# Altium PCB FMC_DIO_32ch_lvds_a.PcbDoc (part 1 of 6)
Units mm, origin at the board's own origin, x right, y up, seen from the top; angles counter-clockwise.
Board outline 69.13 x 77.46 mm, 4 copper layers (Top Layer, G, SUP, Bottom Layer), stack 1.448 mm thick; 558 components, 348 nets, 1996 pads, 784 vias.
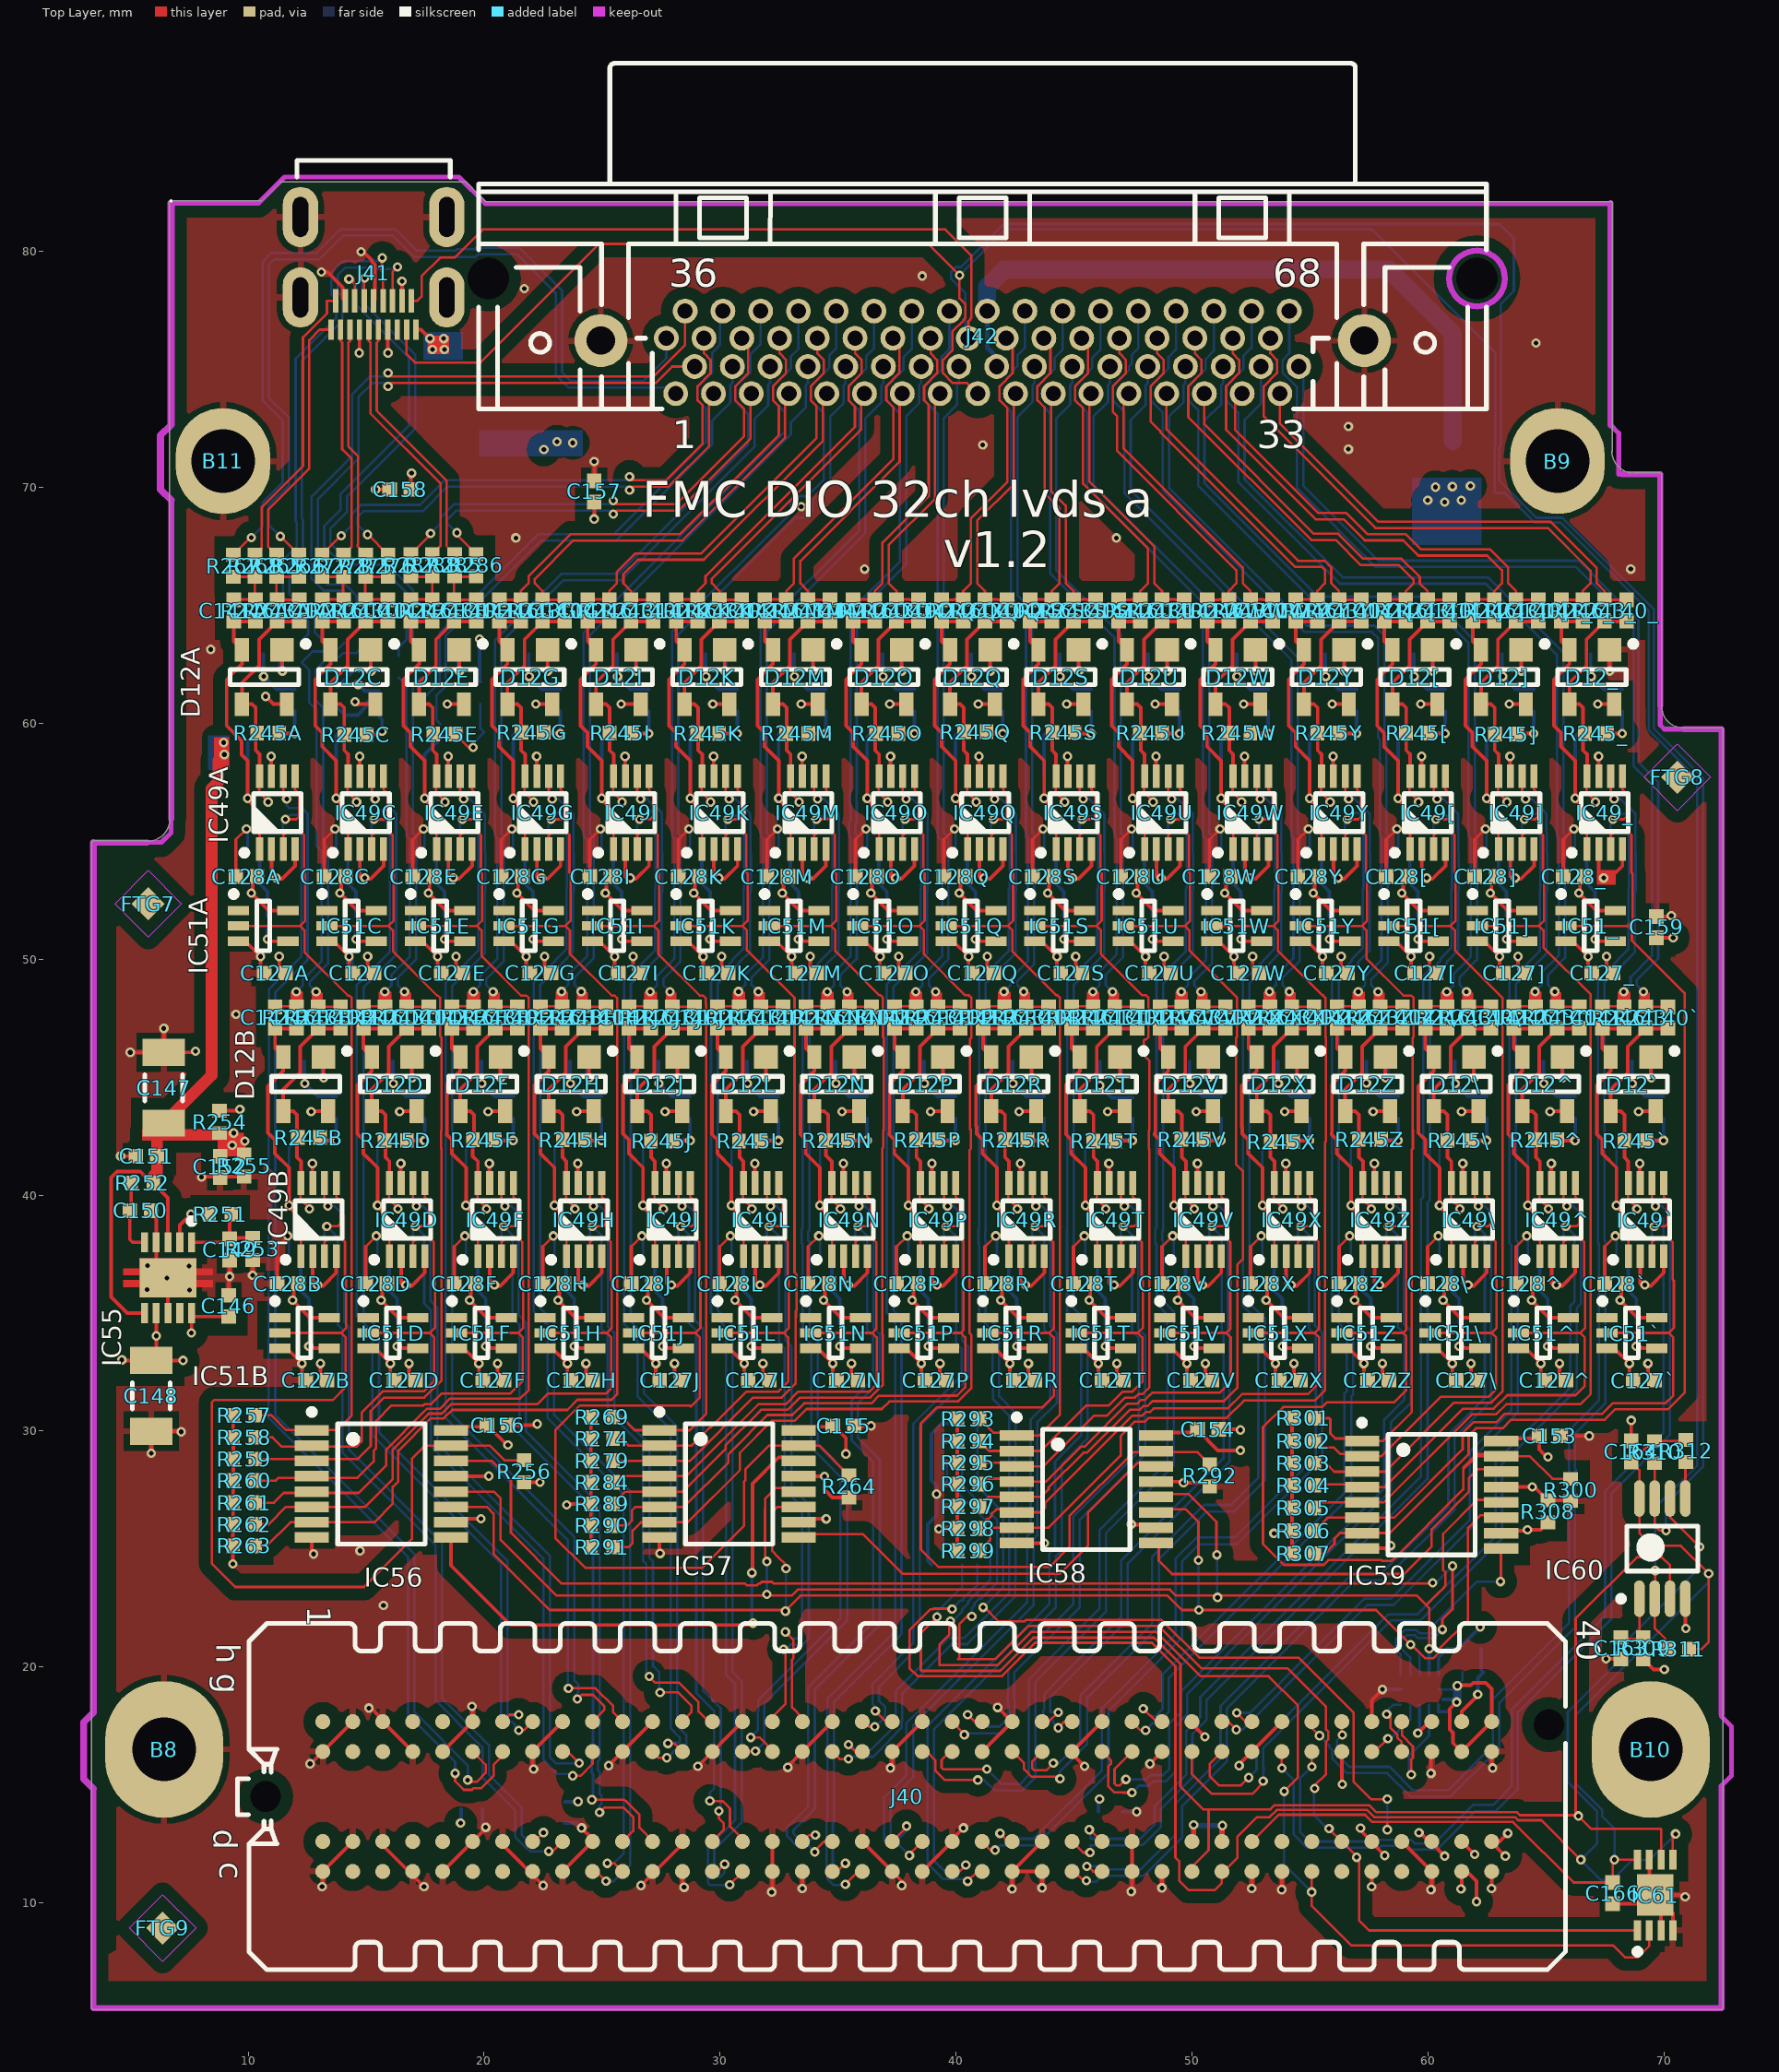
[diagram p0: Top Layer view]
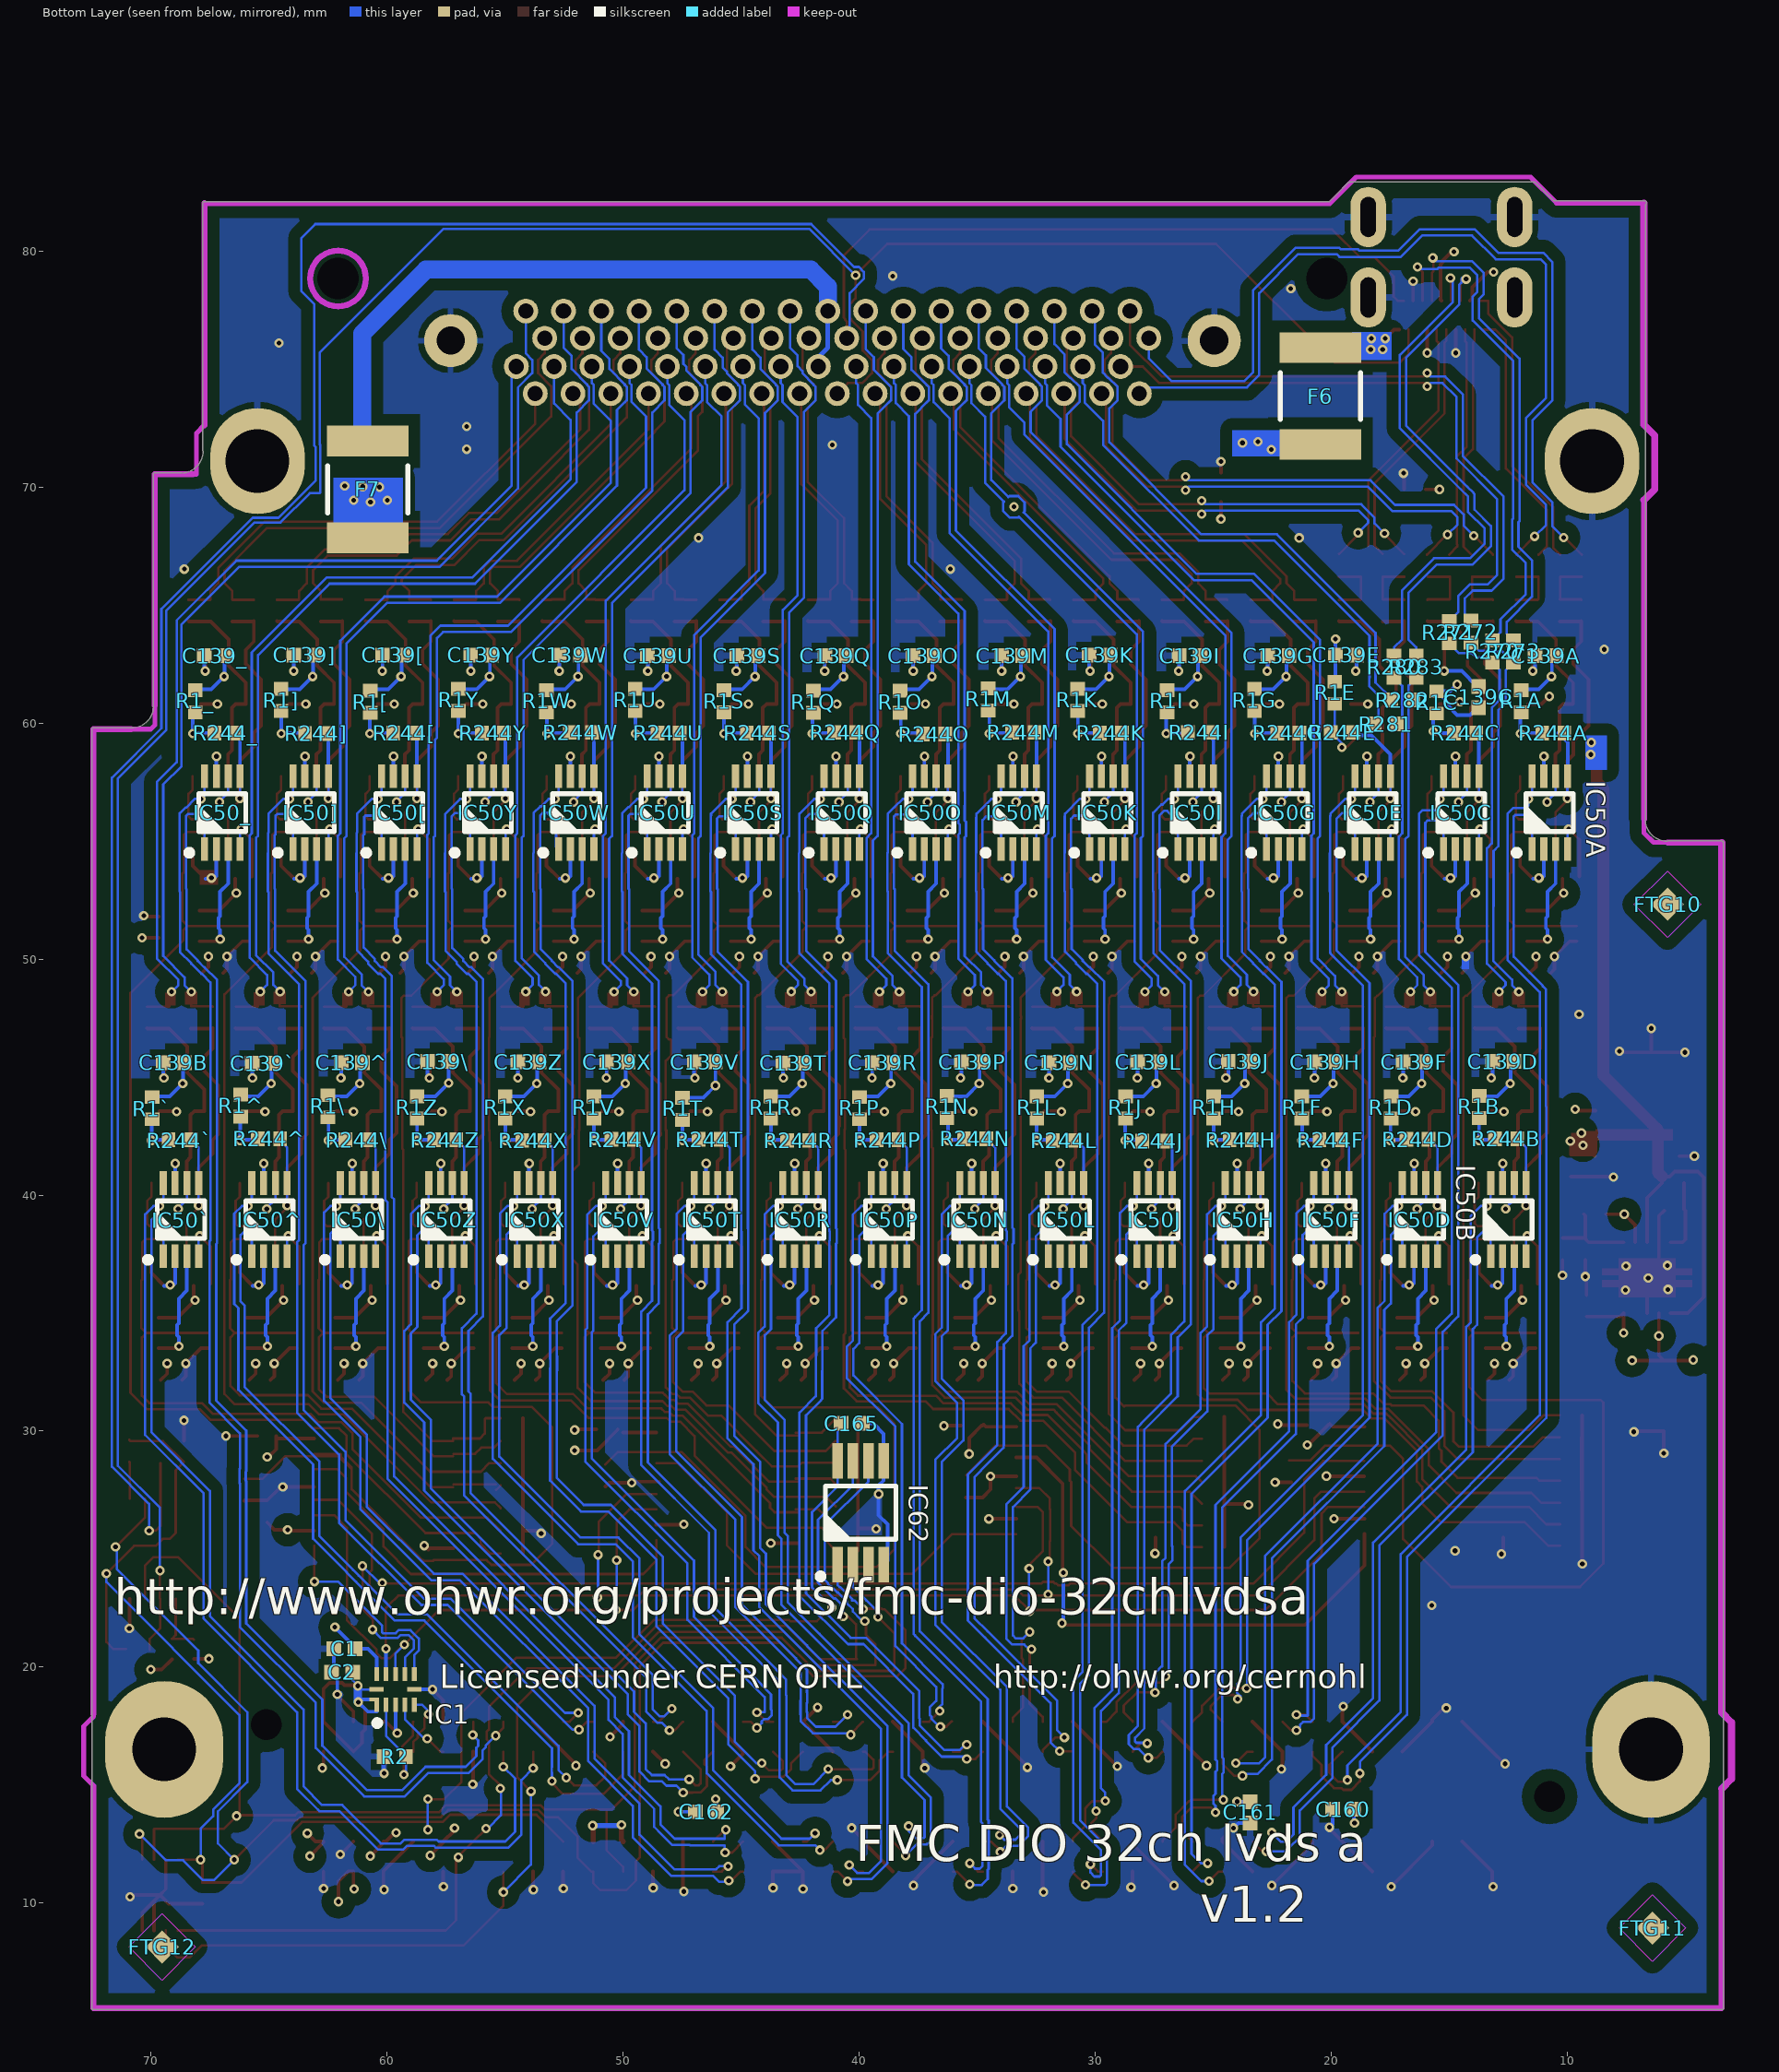
[diagram p1: Bottom Layer view, seen from below]
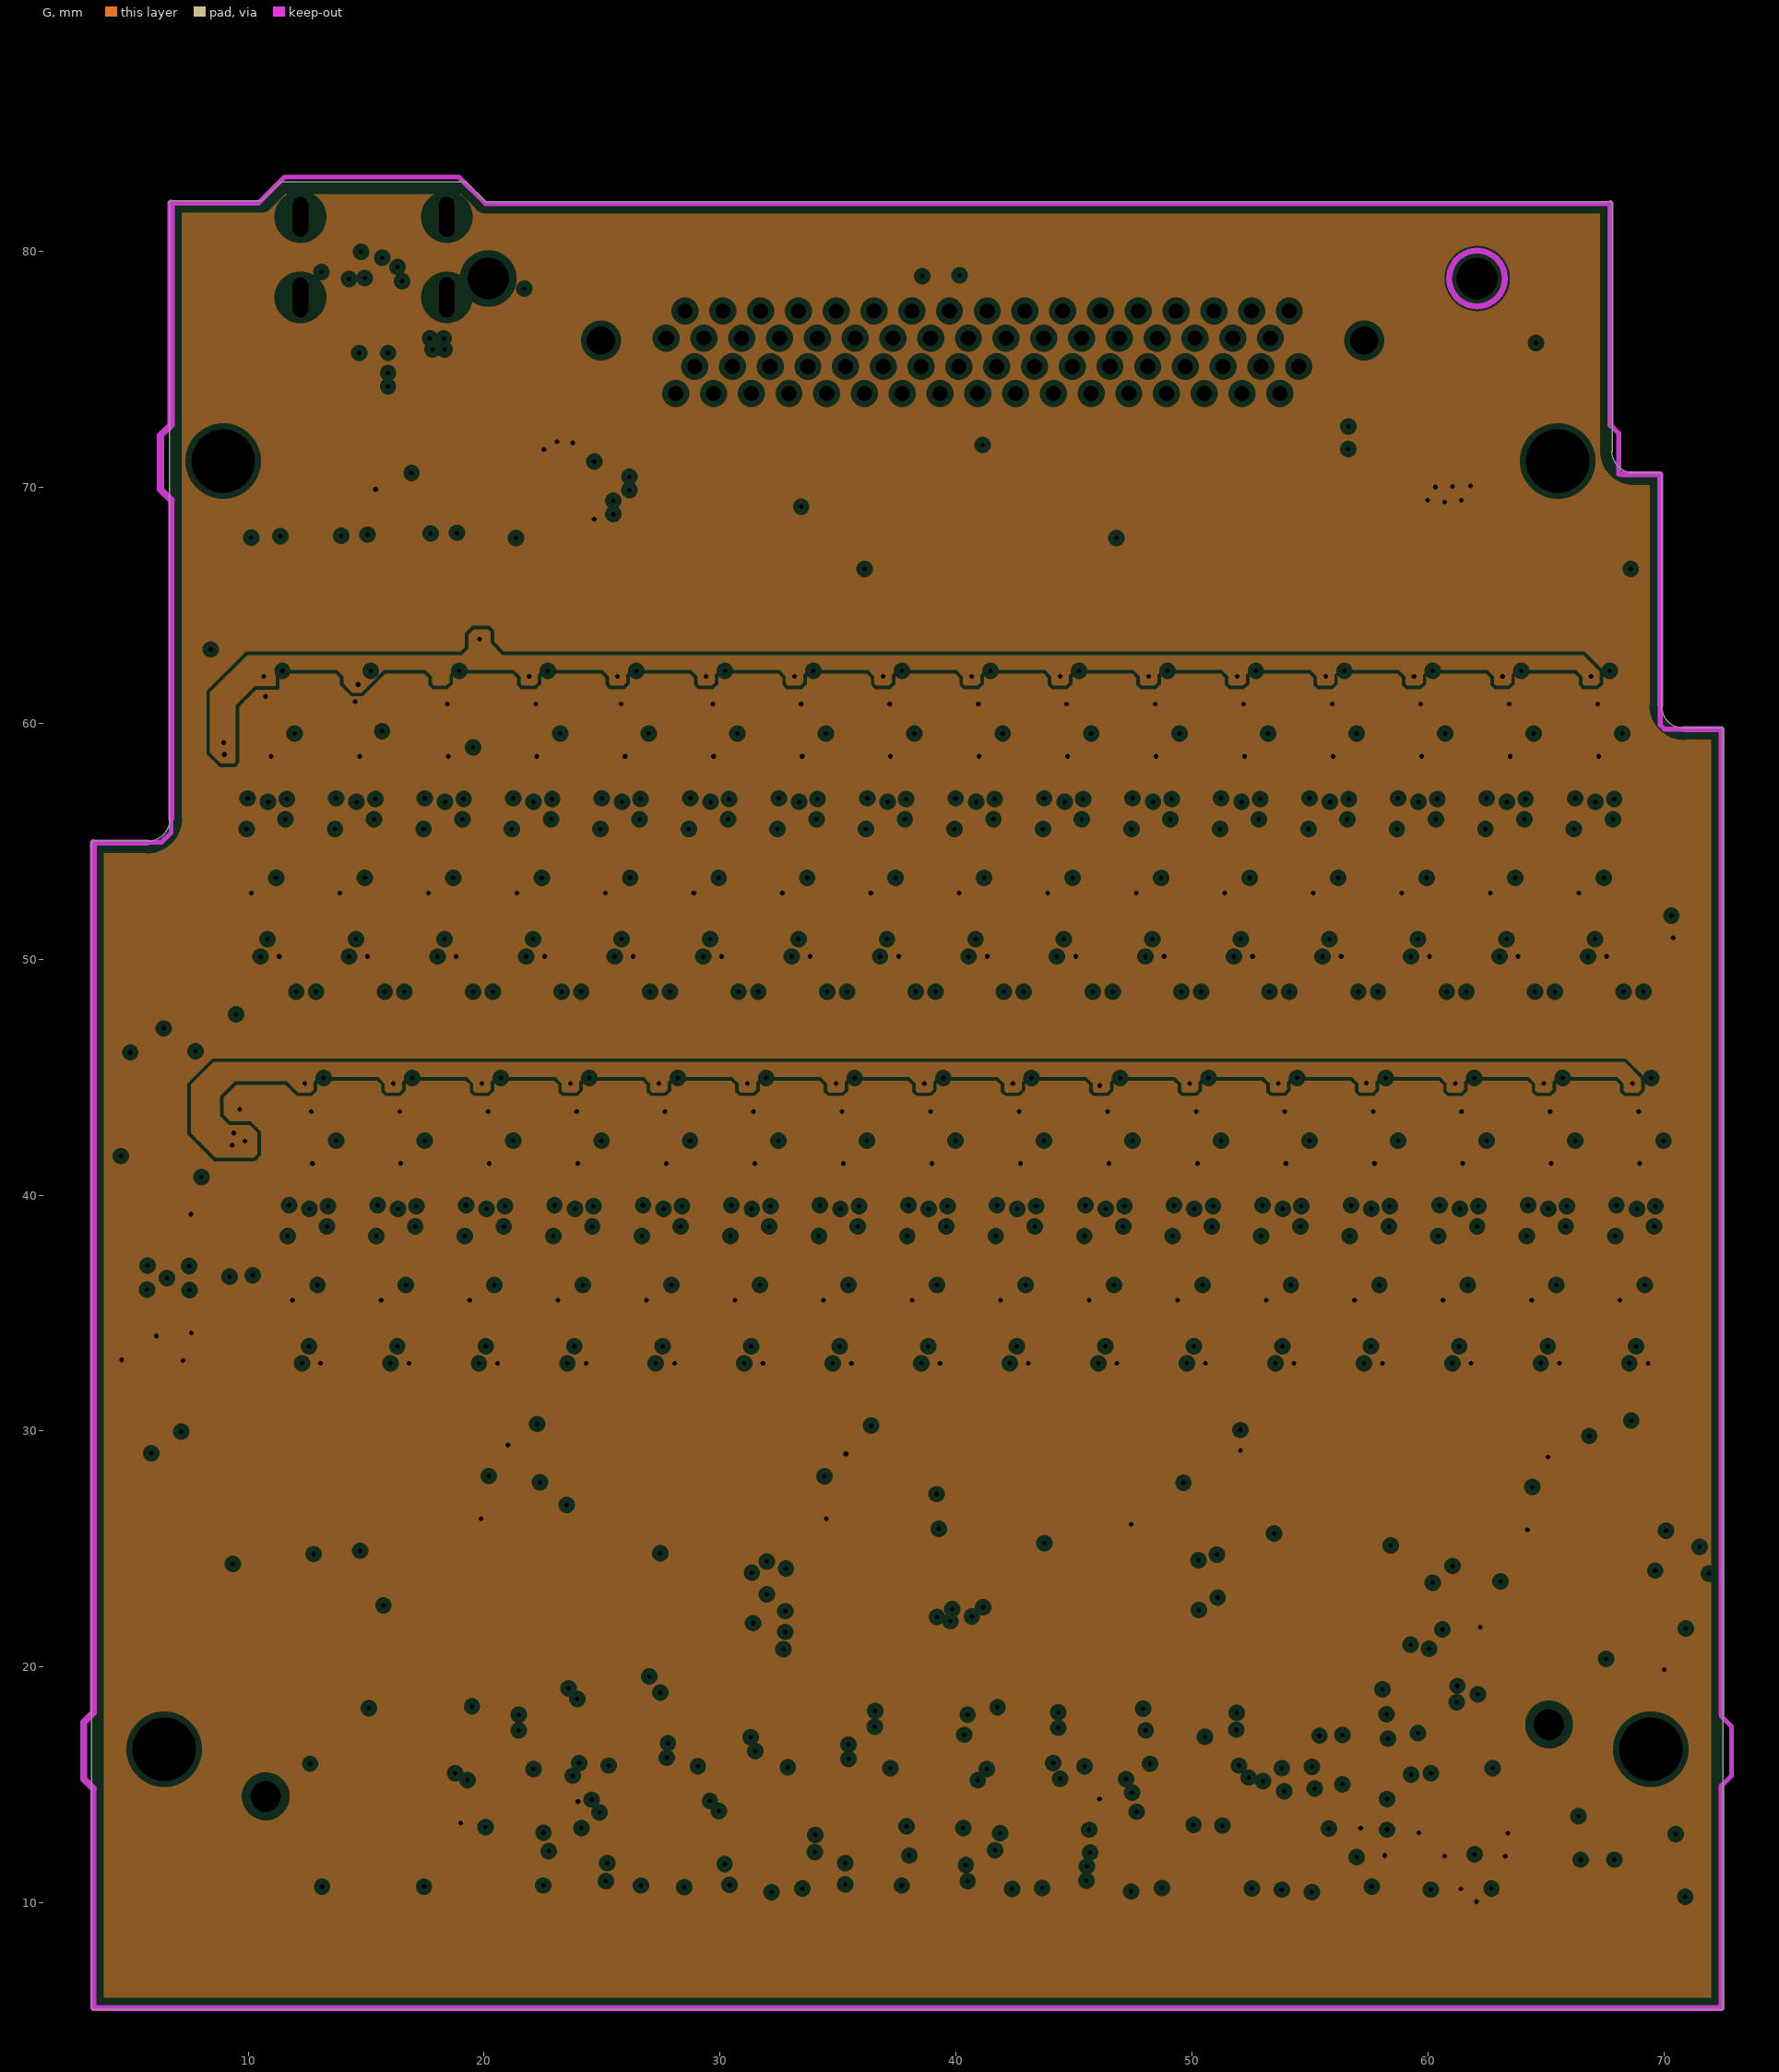
[diagram p2: G, clearances drawn from the general rule]
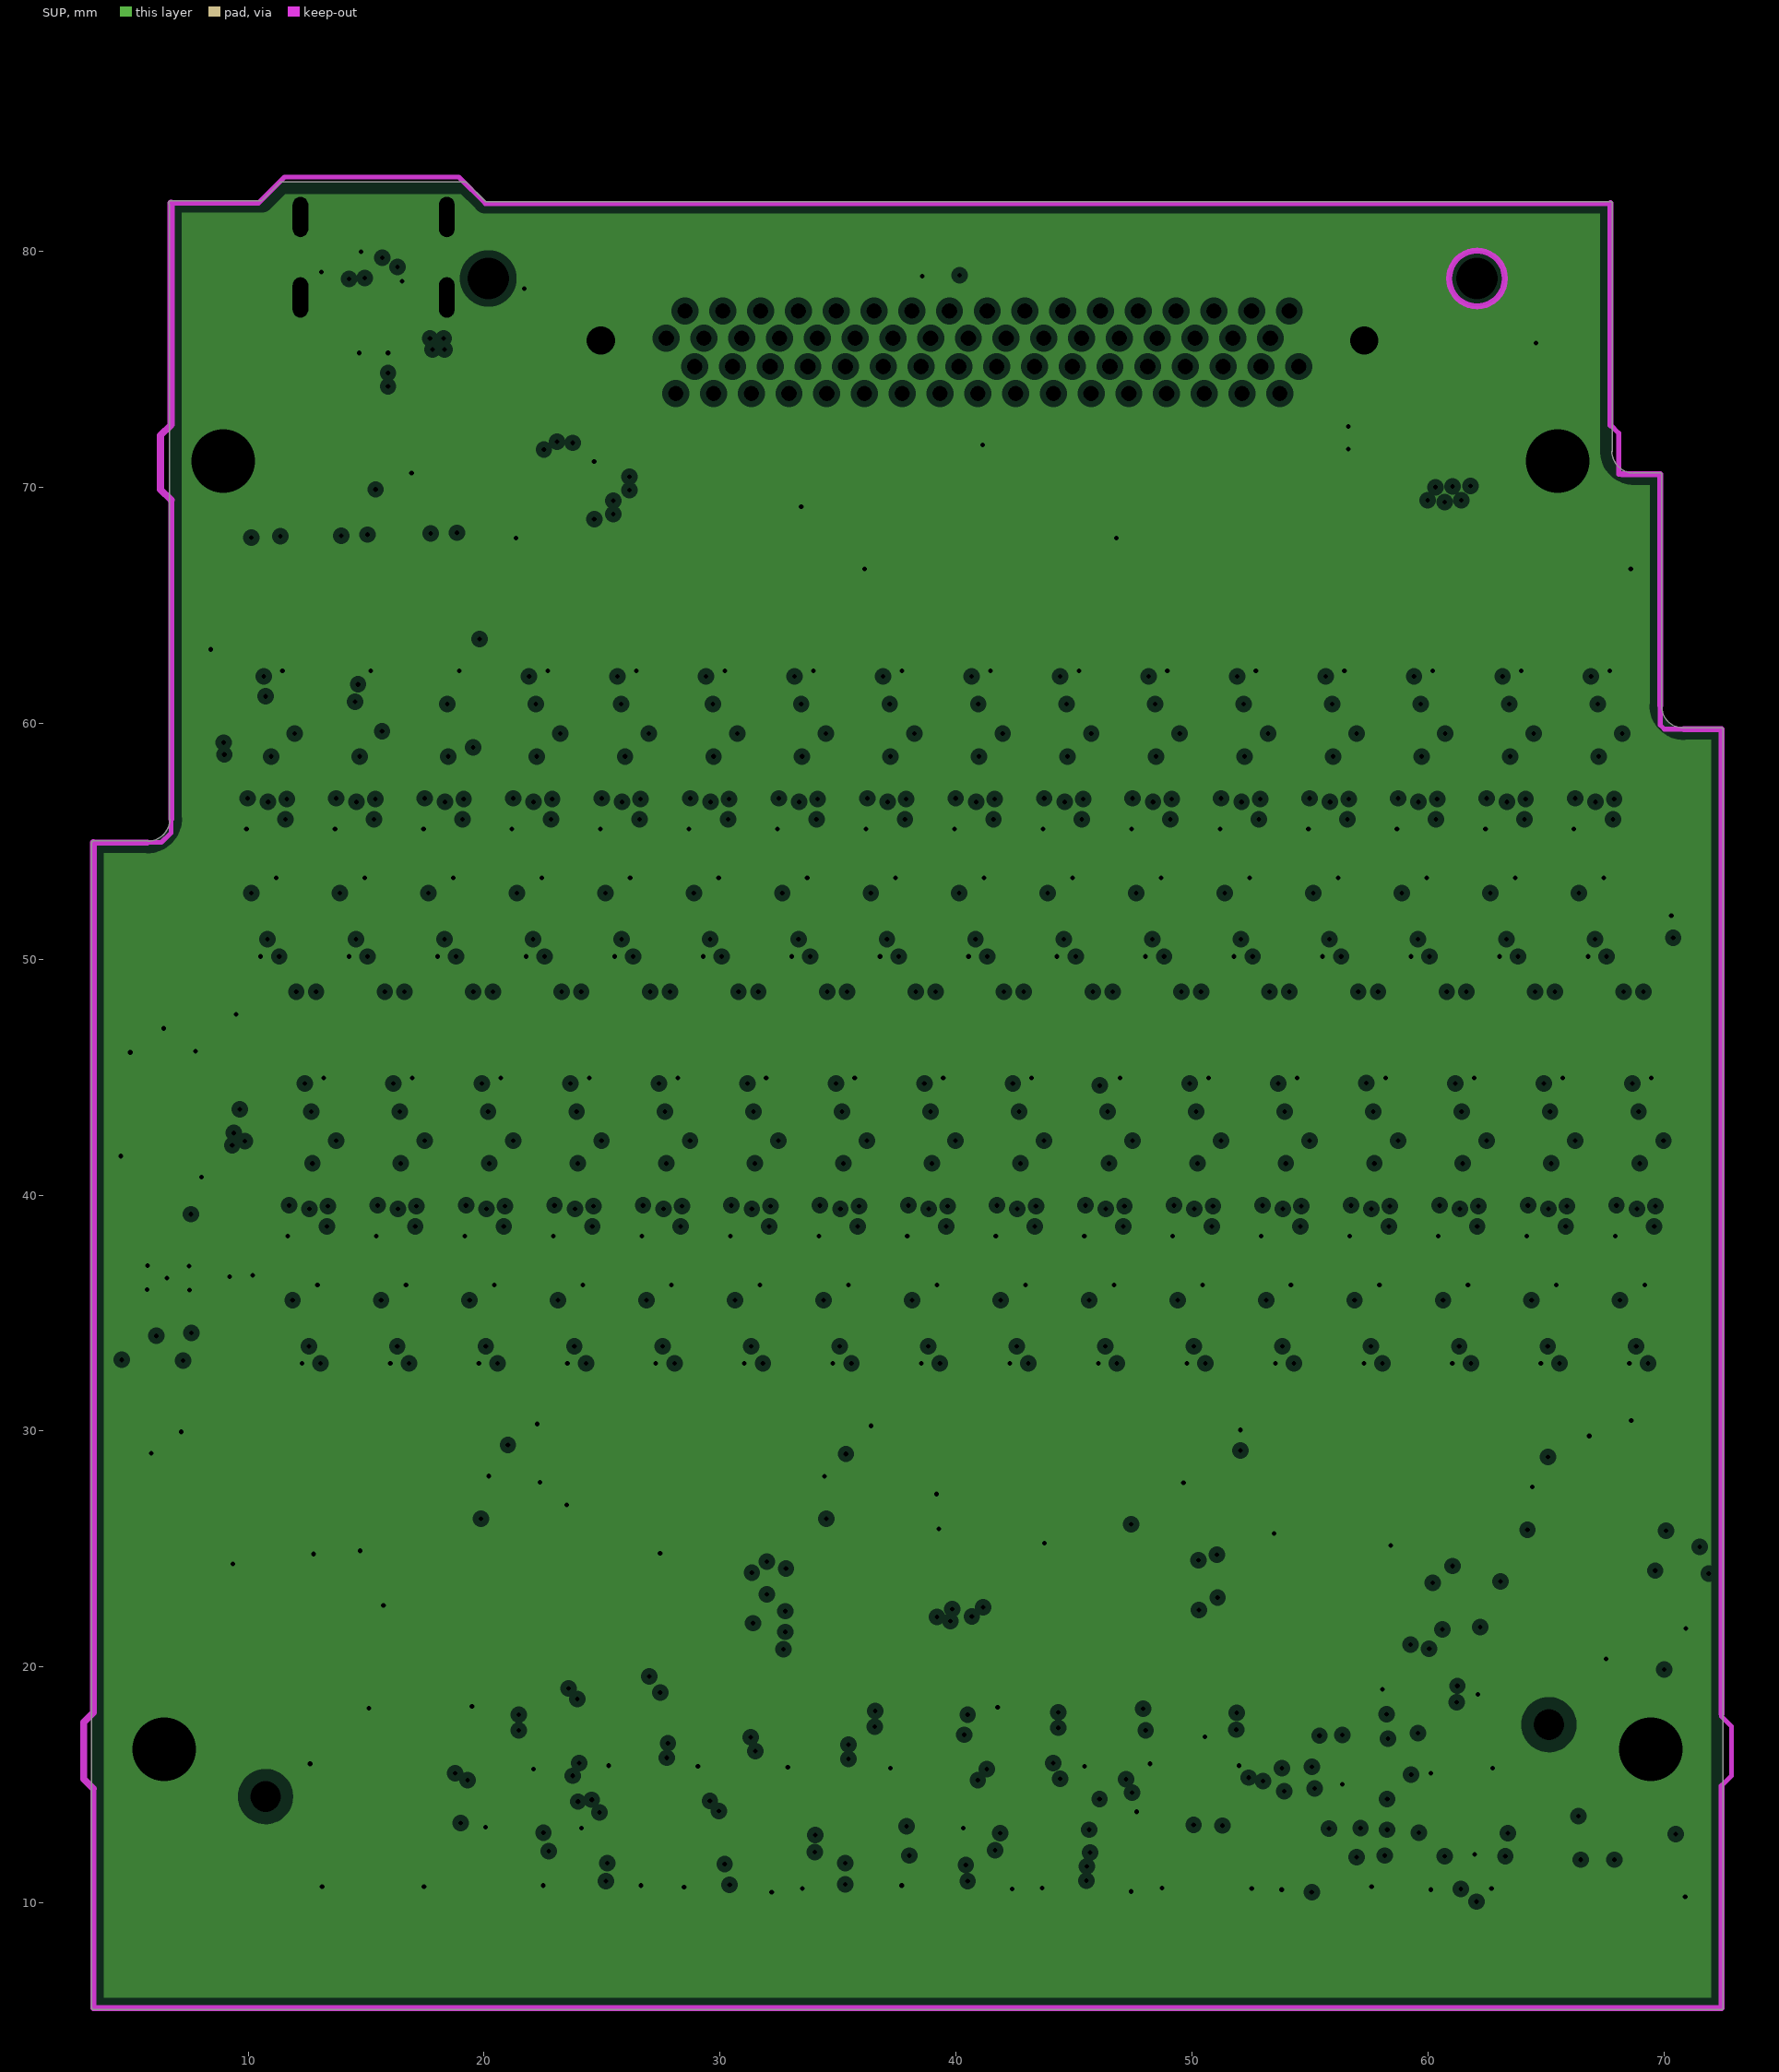
[diagram p3: SUP, clearances drawn from the general rule]
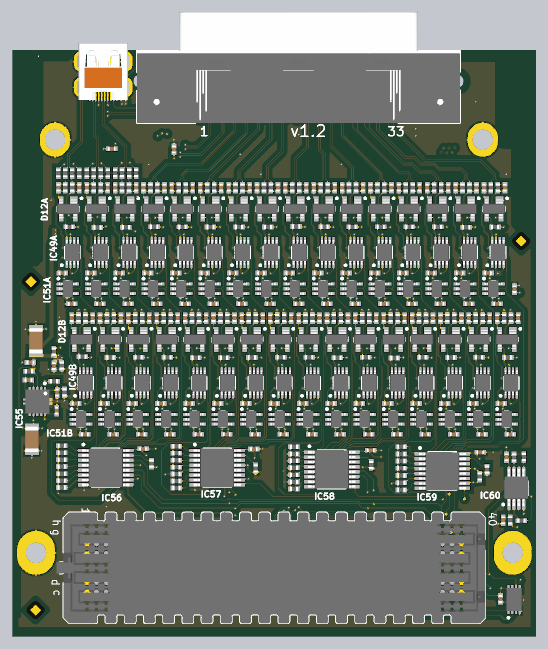
[diagram p9: 3D render of the assembled board from above, using the file's embedded part models]
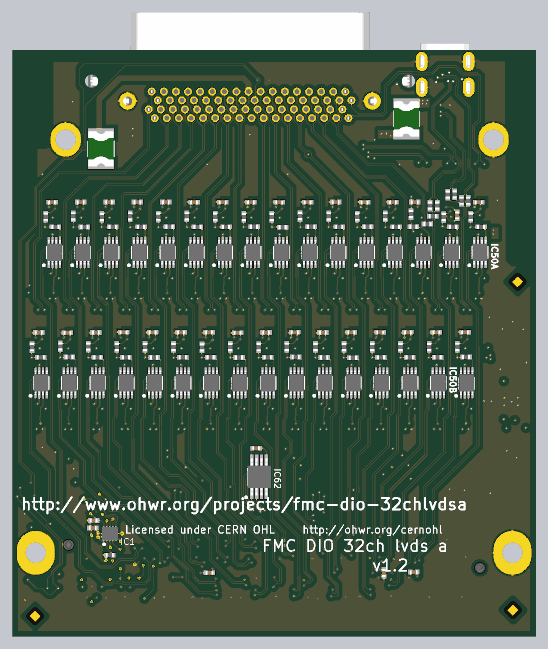
[diagram p10: 3D render of the assembled board from below, using the file's embedded part models]

## Layer stack, top to bottom
Top Layer: signal copper 0.056
Dielectric: core 0.11, FR-4, Dk 4.8
G: plane copper 0.018, net (Multiple Nets)
Dielectric: prepreg 1.08, FR-4, Dk 4.8
SUP: plane copper 0.018, net (Multiple Nets)
Dielectric: core 0.11, FR-4, Dk 4.8
Bottom Layer: signal copper 0.056

## Board outline
3.374,5.56 cw(c3.436,5.572) 3.373,5.572 3.373,54.947 cw(c3.436,54.947) 3.436,55.011 5.736,55.011 cw(c5.736,54.947) 5.775,54.998 ccw(c5.736,55.947) 6.685,55.909 cw(c6.736,55.947) 6.673,55.947 6.673,81.967 cw(c6.736,82.047) 6.736,82.149 10.578,82.149 11.34,82.911 cw(c11.412,82.839) 11.412,82.941 19.184,82.941 cw(c19.184,82.839) 19.257,82.911 20.049,82.119 cw(c19.977,82.047) 20.056,82.111 67.736,82.111 cw(c67.736,82.047) 67.8,82.047 67.8,71.547 cw(c67.736,71.547) 67.788,71.509 ccw(c68.736,71.547) 68.698,70.598 cw(c68.736,70.547) 68.736,70.611 69.836,70.611 cw(c69.836,70.547) 69.9,70.547 69.9,60.747 cw(c69.836,60.747) 69.888,60.709 ccw(c70.836,60.747) 70.798,59.798 cw(c70.836,59.747) 70.836,59.811 72.436,59.811 cw(c72.436,59.747) 72.5,59.747 72.5,5.547 cw(c72.436,5.547) 72.436,5.483 3.436,5.483 cw(c3.436,5.547)

## Design rules (kind name [scope] priority, off if disabled: settings)
AcuteAngle [All] p1: minimum=4.00000000000000E+0001 checktracksonly=FALSE
Clearance Clearance_GNDP [(InPolygon AND InNet('GNDP'))] p1: gap=0.254
Clearance Poly [(InPolygon AND InNet('GND'))] p2: gap=0.508
Clearance [All] p3: gap=0.102
DiffPairsRouting [InDifferentialPairClass('All Differential Pairs')] p1: maxlimit=0.178 minlimit=0.152 mostfreqgap=0.165 maxuncoupledlength=12.7
Height [All] p1 off: minheight=0 maxheight=25.4 prefheight=12.7
HoleSize [All] p1: absolutevalues=TRUE maxlimit=5.08 minlimit=0.19 maxpercent=80.000 minpercent=20.000
Length DDR_CLK_L [InNetClass('DDR_CLK')] p1: maxlimit=80.264 minlimit=77.724
MatchedLengths DDR_CLK [InNetClass('DDR_CLK')] p1: tolerance=0.127 checknetsindiffpair=TRUE checkdiffpairvsdiffpair=TRUE checkothers=TRUE
MatchedLengths DDR_D_3 [InNetClass('DDR3_D')] p2: tolerance=0.508 checknetsindiffpair=TRUE checkdiffpairvsdiffpair=TRUE checkothers=TRUE
MatchedLengths DDR_D_2 [InNetClass('DDR2_D')] p3: tolerance=0.254 checknetsindiffpair=TRUE checkdiffpairvsdiffpair=TRUE checkothers=TRUE
MatchedLengths DDR_D_1 [InNetClass('DDR1_D')] p4: tolerance=0.508 checknetsindiffpair=TRUE checkdiffpairvsdiffpair=TRUE checkothers=TRUE
MatchedLengths DDR_D_0 [InNetClass('DDR0_D')] p5: tolerance=0.508 checknetsindiffpair=TRUE checkdiffpairvsdiffpair=TRUE checkothers=TRUE
MatchedLengths DDR_A [InNetClass('DDR_A')] p6: tolerance=0.635 checknetsindiffpair=TRUE checkdiffpairvsdiffpair=TRUE checkothers=TRUE
MinimumSolderMaskSliver [All] p1 off: minsoldermaskwidth=0
PlaneClearance [All] p1: clearance=0.25
PlaneConnect [All] p1: planeconnectstyle=Direct reliefexpansion=0.508 reliefentries=4 reliefconductorwidth=0.254 reliefairgap=0.254
PolygonConnect PolygonConnect_pad [(InPadClass('All Pads'))] p1: connectstyle=Relief reliefconductorwidth=0.254 reliefentries=4 polygonreliefangle="90 Angle" airgapwidth=0.254
PolygonConnect [All] p2: connectstyle=Direct reliefconductorwidth=0.254 reliefentries=4 polygonreliefangle="90 Angle" airgapwidth=0.254
RoomDefinition FMC_LVDS_32 [InComponentClass('FMC_LVDS_32')] p1 off: confinementstyle=ConfineIn formatcopy=TRUE lockcomponents=FALSE outline -120.973,-178.121 -70.173,-178.121 -70.173,-152.721 -120.973,-152.721
RoomDefinition U_fmc_digital_io_ipmi [InComponentClass('U_fmc_digital_io_ipmi')] p2 off: confinementstyle=ConfineIn formatcopy=TRUE lockcomponents=FALSE outline -120.973,-178.121 -70.173,-178.121 -70.173,-152.721 -120.973,-152.721
RoomDefinition U_fmc_digital_io_fmc_connector [InComponentClass('U_fmc_digital_io_fmc_connector')] p3 off: confinementstyle=ConfineIn formatcopy=TRUE lockcomponents=FALSE outline -120.973,-178.121 -70.173,-178.121 -70.173,-152.721 -120.973,-152.721
RoomDefinition U_fmc_digital_io_buffers32 [InComponentClass('U_fmc_digital_io_buffers32')] p4 off: confinementstyle=ConfineIn formatcopy=TRUE lockcomponents=FALSE outline -120.973,-178.121 -70.173,-178.121 -70.173,-152.721 -120.973,-152.721
RoomDefinition U_fmc_digital_io_buffers31 [InComponentClass('U_fmc_digital_io_buffers31')] p5 off: confinementstyle=ConfineIn formatcopy=TRUE lockcomponents=FALSE outline -120.973,-178.121 -70.173,-178.121 -70.173,-152.721 -120.973,-152.721
RoomDefinition U_fmc_digital_io_buffers30 [InComponentClass('U_fmc_digital_io_buffers30')] p6 off: confinementstyle=ConfineIn formatcopy=TRUE lockcomponents=FALSE outline -120.973,-178.121 -70.173,-178.121 -70.173,-152.721 -120.973,-152.721
RoomDefinition U_fmc_digital_io_buffers29 [InComponentClass('U_fmc_digital_io_buffers29')] p7 off: confinementstyle=ConfineIn formatcopy=TRUE lockcomponents=FALSE outline -120.973,-178.121 -70.173,-178.121 -70.173,-152.721 -120.973,-152.721
RoomDefinition U_fmc_digital_io_buffers28 [InComponentClass('U_fmc_digital_io_buffers28')] p8 off: confinementstyle=ConfineIn formatcopy=TRUE lockcomponents=FALSE outline -120.973,-178.121 -70.173,-178.121 -70.173,-152.721 -120.973,-152.721
RoomDefinition U_fmc_digital_io_buffers27 [InComponentClass('U_fmc_digital_io_buffers27')] p9 off: confinementstyle=ConfineIn formatcopy=TRUE lockcomponents=FALSE outline -120.973,-178.121 -70.173,-178.121 -70.173,-152.721 -120.973,-152.721
RoomDefinition U_fmc_digital_io_buffers26 [InComponentClass('U_fmc_digital_io_buffers26')] p10 off: confinementstyle=ConfineIn formatcopy=TRUE lockcomponents=FALSE outline -120.973,-178.121 -70.173,-178.121 -70.173,-152.721 -120.973,-152.721
RoomDefinition U_fmc_digital_io_buffers25 [InComponentClass('U_fmc_digital_io_buffers25')] p11 off: confinementstyle=ConfineIn formatcopy=TRUE lockcomponents=FALSE outline -120.973,-178.121 -70.173,-178.121 -70.173,-152.721 -120.973,-152.721
RoomDefinition U_fmc_digital_io_buffers24 [InComponentClass('U_fmc_digital_io_buffers24')] p12 off: confinementstyle=ConfineIn formatcopy=TRUE lockcomponents=FALSE outline -120.973,-178.121 -70.173,-178.121 -70.173,-152.721 -120.973,-152.721
RoomDefinition U_fmc_digital_io_buffers22 [InComponentClass('U_fmc_digital_io_buffers22')] p13 off: confinementstyle=ConfineIn formatcopy=TRUE lockcomponents=FALSE outline -120.973,-178.121 -70.173,-178.121 -70.173,-152.721 -120.973,-152.721
RoomDefinition U_fmc_digital_io_buffers21 [InComponentClass('U_fmc_digital_io_buffers21')] p14 off: confinementstyle=ConfineIn formatcopy=TRUE lockcomponents=FALSE outline -120.973,-178.121 -70.173,-178.121 -70.173,-152.721 -120.973,-152.721
RoomDefinition U_fmc_digital_io_buffers20 [InComponentClass('U_fmc_digital_io_buffers20')] p15 off: confinementstyle=ConfineIn formatcopy=TRUE lockcomponents=FALSE outline -120.973,-178.121 -70.173,-178.121 -70.173,-152.721 -120.973,-152.721
RoomDefinition U_fmc_digital_io_buffers10 [InComponentClass('U_fmc_digital_io_buffers10')] p16 off: confinementstyle=ConfineIn formatcopy=TRUE lockcomponents=FALSE outline -120.973,-178.121 -70.173,-178.121 -70.173,-152.721 -120.973,-152.721
RoomDefinition U_fmc_digital_io_buffers9 [InComponentClass('U_fmc_digital_io_buffers9')] p17 off: confinementstyle=ConfineIn formatcopy=TRUE lockcomponents=FALSE outline -120.973,-178.121 -70.173,-178.121 -70.173,-152.721 -120.973,-152.721
RoomDefinition U_fmc_digital_io_buffers8 [InComponentClass('U_fmc_digital_io_buffers8')] p18 off: confinementstyle=ConfineIn formatcopy=TRUE lockcomponents=FALSE outline -120.973,-178.121 -70.173,-178.121 -70.173,-152.721 -120.973,-152.721
RoomDefinition U_fmc_digital_io_buffers7 [InComponentClass('U_fmc_digital_io_buffers7')] p19 off: confinementstyle=ConfineIn formatcopy=TRUE lockcomponents=FALSE outline -120.973,-178.121 -70.173,-178.121 -70.173,-152.721 -120.973,-152.721
RoomDefinition U_fmc_digital_io_buffers6 [InComponentClass('U_fmc_digital_io_buffers6')] p20 off: confinementstyle=ConfineIn formatcopy=TRUE lockcomponents=FALSE outline -120.973,-178.121 -70.173,-178.121 -70.173,-152.721 -120.973,-152.721
RoomDefinition U_fmc_digital_io_buffers5 [InComponentClass('U_fmc_digital_io_buffers5')] p21 off: confinementstyle=ConfineIn formatcopy=TRUE lockcomponents=FALSE outline -120.973,-178.121 -70.173,-178.121 -70.173,-152.721 -120.973,-152.721
RoomDefinition U_fmc_digital_io_buffers4 [InComponentClass('U_fmc_digital_io_buffers4')] p22 off: confinementstyle=ConfineIn formatcopy=TRUE lockcomponents=FALSE outline -120.973,-178.121 -70.173,-178.121 -70.173,-152.721 -120.973,-152.721
RoomDefinition U_fmc_digital_io_buffers3 [InComponentClass('U_fmc_digital_io_buffers3')] p23 off: confinementstyle=ConfineIn formatcopy=TRUE lockcomponents=FALSE outline -120.973,-178.121 -70.173,-178.121 -70.173,-152.721 -120.973,-152.721
RoomDefinition U_fmc_digital_io_buffers2 [InComponentClass('U_fmc_digital_io_buffers2')] p24 off: confinementstyle=ConfineIn formatcopy=TRUE lockcomponents=FALSE outline -120.973,-178.121 -70.173,-178.121 -70.173,-152.721 -120.973,-152.721
RoomDefinition U_fmc_digital_io_buffers1 [InComponentClass('U_fmc_digital_io_buffers1')] p25 off: confinementstyle=ConfineIn formatcopy=TRUE lockcomponents=FALSE outline -120.973,-178.121 -70.173,-178.121 -70.173,-152.721 -120.973,-152.721
RoomDefinition U_fmc_digital_io_buffers19 [InComponentClass('U_fmc_digital_io_buffers19')] p26 off: confinementstyle=ConfineIn formatcopy=TRUE lockcomponents=FALSE outline -120.973,-178.121 -70.173,-178.121 -70.173,-152.721 -120.973,-152.721
RoomDefinition U_fmc_digital_io_buffers18 [InComponentClass('U_fmc_digital_io_buffers18')] p27 off: confinementstyle=ConfineIn formatcopy=TRUE lockcomponents=FALSE outline -120.973,-178.121 -70.173,-178.121 -70.173,-152.721 -120.973,-152.721
RoomDefinition U_fmc_digital_io_buffers17 [InComponentClass('U_fmc_digital_io_buffers17')] p28 off: confinementstyle=ConfineIn formatcopy=TRUE lockcomponents=FALSE outline -120.973,-178.121 -70.173,-178.121 -70.173,-152.721 -120.973,-152.721
RoomDefinition U_fmc_digital_io_buffers16 [InComponentClass('U_fmc_digital_io_buffers16')] p29 off: confinementstyle=ConfineIn formatcopy=TRUE lockcomponents=FALSE outline -120.973,-178.121 -70.173,-178.121 -70.173,-152.721 -120.973,-152.721
RoomDefinition U_fmc_digital_io_buffers15 [InComponentClass('U_fmc_digital_io_buffers15')] p30 off: confinementstyle=ConfineIn formatcopy=TRUE lockcomponents=FALSE outline -120.973,-178.121 -70.173,-178.121 -70.173,-152.721 -120.973,-152.721
RoomDefinition U_fmc_digital_io_buffers14 [InComponentClass('U_fmc_digital_io_buffers14')] p31 off: confinementstyle=ConfineIn formatcopy=TRUE lockcomponents=FALSE outline -120.973,-178.121 -70.173,-178.121 -70.173,-152.721 -120.973,-152.721
RoomDefinition U_fmc_digital_io_buffers13 [InComponentClass('U_fmc_digital_io_buffers13')] p32 off: confinementstyle=ConfineIn formatcopy=TRUE lockcomponents=FALSE outline -120.973,-178.121 -70.173,-178.121 -70.173,-152.721 -120.973,-152.721
RoomDefinition U_fmc_digital_io_buffers11 [InComponentClass('U_fmc_digital_io_buffers11')] p33 off: confinementstyle=ConfineIn formatcopy=TRUE lockcomponents=FALSE outline -120.973,-178.121 -70.173,-178.121 -70.173,-152.721 -120.973,-152.721
RoomDefinition U_fmc_digital_io_buffers23 [InComponentClass('U_fmc_digital_io_buffers23')] p34 off: confinementstyle=ConfineIn formatcopy=TRUE lockcomponents=FALSE outline -120.973,-178.121 -70.173,-178.121 -70.173,-152.721 -120.973,-152.721
RoomDefinition U_fmc_digital_io_buffers12 [InComponentClass('U_fmc_digital_io_buffers12')] p35 off: confinementstyle=ConfineIn formatcopy=TRUE lockcomponents=FALSE outline -120.973,-178.121 -70.173,-178.121 -70.173,-152.721 -120.973,-152.721
RoutingVias [All] p1: holewidth=0.2 width=0.4 viastyle="Through Hole" minholewidth=0.2 minwidth=0.4 maxholewidth=0.5 maxwidth=1
SilkToSilkClearance [All] p1 off: silktosilkclearance=0
SilkscreenOverComponentPads [IsPad] p1 off: minsilkscreentomaskgap=0.025
SolderMaskExpansion [All] p1: expansion=0.08
ViasUnderSMD ViasUnderSMD_ICs [(InComponent('IC6')) OR (InComponent('IC10A'))  OR (InComponent('IC10B'))    OR (InComponent('IC5'))OR (InComponent('IC23'))] p1: allowed=TRUE
ViasUnderSMD [All] p2: allowed=FALSE
Width DIFF_PAIRS [InDifferentialPairClass('All Differential Pairs')] p1: maxlimit=0.102 minlimit=0.102 preferedwidth=0.102 minimp=50.000000 maximp=50.000000 favimp=50.000000
Width [All] p2: maxlimit=2.54 minlimit=0.102 preferedwidth=0.152 minimp=0.000000 maximp=0.000000 favimp=100000000000000005400000000000000.000000
20 further rules are at their usual default settings.

## Classes and differential pairs
channel class fmc_digital_io_buffers: U_fmc_digital_io_buffers1 U_fmc_digital_io_buffers2 U_fmc_digital_io_buffers3 U_fmc_digital_io_buffers4 U_fmc_digital_io_buffers5 U_fmc_digital_io_buffers6 U_fmc_digital_io_buffers7 U_fmc_digital_io_buffers8 U_fmc_digital_io_buffers9 U_fmc_digital_io_buffers10 U_fmc_digital_io_buffers11 U_fmc_digital_io_buffers12 U_fmc_digital_io_buffers13 U_fmc_digital_io_buffers14 U_fmc_digital_io_buffers15 U_fmc_digital_io_buffers16 U_fmc_digital_io_buffers17 U_fmc_digital_io_buffers18 U_fmc_digital_io_buffers19 U_fmc_digital_io_buffers20 U_fmc_digital_io_buffers21 U_fmc_digital_io_buffers22 U_fmc_digital_io_buffers23 U_fmc_digital_io_buffers24 U_fmc_digital_io_buffers25 U_fmc_digital_io_buffers26 U_fmc_digital_io_buffers27 U_fmc_digital_io_buffers28 U_fmc_digital_io_buffers29 U_fmc_digital_io_buffers30 U_fmc_digital_io_buffers31 U_fmc_digital_io_buffers32
net class FMC1_P[32..1]: FMC1_P1 FMC1_P2 FMC1_P3 FMC1_P4 FMC1_P5 FMC1_P6 FMC1_P7 FMC1_P8 FMC1_P9 FMC1_P10 FMC1_P11 FMC1_P12 FMC1_P13 FMC1_P14 FMC1_P15 FMC1_P16 FMC1_P17 FMC1_P18 FMC1_P19 FMC1_P20 FMC1_P21 FMC1_P22 FMC1_P23 FMC1_P24 FMC1_P25 FMC1_P26 FMC1_P27 FMC1_P28 FMC1_P29 FMC1_P30 FMC1_P31 FMC1_P32
net class FMC1_N[32..1]: FMC1_N1 FMC1_N2 FMC1_N3 FMC1_N4 FMC1_N5 FMC1_N6 FMC1_N7 FMC1_N8 FMC1_N9 FMC1_N10 FMC1_N11 FMC1_N12 FMC1_N13 FMC1_N14 FMC1_N15 FMC1_N16 FMC1_N17 FMC1_N18 FMC1_N19 FMC1_N20 FMC1_N21 FMC1_N22 FMC1_N23 FMC1_N24 FMC1_N25 FMC1_N26 FMC1_N27 FMC1_N28 FMC1_N29 FMC1_N30 FMC1_N31 FMC1_N32
net class EN1_RX[32..1]: EN1_RX1 EN1_RX2 EN1_RX3 EN1_RX4 EN1_RX5 EN1_RX6 EN1_RX7 EN1_RX8 EN1_RX9 EN1_RX10 EN1_RX11 EN1_RX12 EN1_RX13 EN1_RX14 EN1_RX15 EN1_RX16 EN1_RX17 EN1_RX18 EN1_RX19 EN1_RX20 EN1_RX21 EN1_RX22 EN1_RX23 EN1_RX24 EN1_RX25 EN1_RX26 EN1_RX27 EN1_RX28 EN1_RX29 EN1_RX30 EN1_RX31 EN1_RX32
net class CON1_P[32..1]: CON1_P1 CON1_P2 CON1_P3 CON1_P4 CON1_P5 CON1_P6 CON1_P7 CON1_P8 CON1_P9 CON1_P10 CON1_P11 CON1_P12 CON1_P13 CON1_P14 CON1_P15 CON1_P16 CON1_P17 CON1_P18 CON1_P19 CON1_P20 CON1_P21 CON1_P22 CON1_P23 CON1_P24 CON1_P25 CON1_P26 CON1_P27 CON1_P28 CON1_P29 CON1_P30 CON1_P31 CON1_P32
net class CON1_N[32..1]: CON1_N1 CON1_N2 CON1_N3 CON1_N4 CON1_N5 CON1_N6 CON1_N7 CON1_N8 CON1_N9 CON1_N10 CON1_N11 CON1_N12 CON1_N13 CON1_N14 CON1_N15 CON1_N16 CON1_N17 CON1_N18 CON1_N19 CON1_N20 CON1_N21 CON1_N22 CON1_N23 CON1_N24 CON1_N25 CON1_N26 CON1_N27 CON1_N28 CON1_N29 CON1_N30 CON1_N31 CON1_N32
component class FMC_LVDS_32: B8 B9 B10 B11 C1 C2 C146 C147 C148 C149 C150 C151 C152 C153 C154 C155 C156 C157 C158 C159 C160 C161 C162 C163 C164 F6 F7 IC1 IC55 IC56 IC57 IC58 IC59 IC60 J41 J42 R2 R251 R252 R253 R254 R255 R256 R257 R258 R259 R260 R261 R262 R263 R264 R265 R266 R267 R268 R269 R270 R271 R272 R273 R274 R275 R276 R277 R278 R279 R280 R281 R282 R283 R284 R285 R286 R287 R288 R289 R290 R291 R292 R293 R294 R295 R296 R297 R298 R299 R300 R301 R302 R303 R304 R305 R306 R307 R308 R309 R310 R311 R312
component class U_fmc_digital_io_ipmi: C165 C166 IC61 IC62
component class U_fmc_digital_io_buffers9: C127I C128I C139I C140I C141I D12I IC49I IC50I IC51I R1I R243I R244I R245I R246I
component class U_fmc_digital_io_buffers8: C127H C128H C139H C140H C141H D12H IC49H IC50H IC51H R1H R243H R244H R245H R246H
component class U_fmc_digital_io_buffers7: C127G C128G C139G C140G C141G D12G IC49G IC50G IC51G R1G R243G R244G R245G R246G
component class U_fmc_digital_io_buffers6: C127F C128F C139F C140F C141F D12F IC49F IC50F IC51F R1F R243F R244F R245F R246F
component class U_fmc_digital_io_buffers5: C127E C128E C139E C140E C141E D12E IC49E IC50E IC51E R1E R243E R244E R245E R246E
component class U_fmc_digital_io_buffers4: C127D C128D C139D C140D C141D D12D IC49D IC50D IC51D R1D R243D R244D R245D R246D
component class U_fmc_digital_io_buffers3: C127C C128C C139C C140C C141C D12C IC49C IC50C IC51C R1C R243C R244C R245C R246C
component class U_fmc_digital_io_buffers2: C127B C128B C139B C140B C141B D12B IC49B IC50B IC51B R1B R243B R244B R245B R246B
component class U_fmc_digital_io_buffers1: C127A C128A C139A C140A C141A D12A IC49A IC50A IC51A R1A R243A R244A R245A R246A
component class U_fmc_digital_io_buffers10: C127J C128J C139J C140J C141J D12J IC49J IC50J IC51J R1J R243J R244J R245J R246J
component class U_fmc_digital_io_buffers11: C127K C128K C139K C140K C141K D12K IC49K IC50K IC51K R1K R243K R244K R245K R246K
component class U_fmc_digital_io_buffers12: C127L C128L C139L C140L C141L D12L IC49L IC50L IC51L R1L R243L R244L R245L R246L
component class U_fmc_digital_io_buffers13: C127M C128M C139M C140M C141M D12M IC49M IC50M IC51M R1M R243M R244M R245M R246M
component class U_fmc_digital_io_buffers14: C127N C128N C139N C140N C141N D12N IC49N IC50N IC51N R1N R243N R244N R245N R246N
component class U_fmc_digital_io_buffers15: C127O C128O C139O C140O C141O D12O IC49O IC50O IC51O R1O R243O R244O R245O R246O
component class U_fmc_digital_io_buffers16: C127P C128P C139P C140P C141P D12P IC49P IC50P IC51P R1P R243P R244P R245P R246P
component class U_fmc_digital_io_buffers17: C127Q C128Q C139Q C140Q C141Q D12Q IC49Q IC50Q IC51Q R1Q R243Q R244Q R245Q R246Q
component class U_fmc_digital_io_buffers18: C127R C128R C139R C140R C141R D12R IC49R IC50R IC51R R1R R243R R244R R245R R246R
component class U_fmc_digital_io_buffers19: C127S C128S C139S C140S C141S D12S IC49S IC50S IC51S R1S R243S R244S R245S R246S
component class U_fmc_digital_io_buffers20: C127T C128T C139T C140T C141T D12T IC49T IC50T IC51T R1T R243T R244T R245T R246T
component class U_fmc_digital_io_buffers21: C127U C128U C139U C140U C141U D12U IC49U IC50U IC51U R1U R243U R244U R245U R246U
component class U_fmc_digital_io_buffers22: C127V C128V C139V C140V C141V D12V IC49V IC50V IC51V R1V R243V R244V R245V R246V
component class U_fmc_digital_io_buffers23: C127W C128W C139W C140W C141W D12W IC49W IC50W IC51W R1W R243W R244W R245W R246W
component class U_fmc_digital_io_buffers24: C127X C128X C139X C140X C141X D12X IC49X IC50X IC51X R1X R243X R244X R245X R246X
component class U_fmc_digital_io_buffers25: C127Y C128Y C139Y C140Y C141Y D12Y IC49Y IC50Y IC51Y R1Y R243Y R244Y R245Y R246Y
component class U_fmc_digital_io_buffers26: C127Z C128Z C139Z C140Z C141Z D12Z IC49Z IC50Z IC51Z R1Z R243Z R244Z R245Z R246Z
component class U_fmc_digital_io_buffers27: C127[ C128[ C139[ C140[ C141[ D12[ IC49[ IC50[ IC51[ R1[ R243[ R244[ R245[ R246[
component class U_fmc_digital_io_buffers28: C127\ C128\ C139\ C140\ C141\ D12\ IC49\ IC50\ IC51\ R1\ R243\ R244\ R245\ R246\
component class U_fmc_digital_io_buffers29: C127] C128] C139] C140] C141] D12] IC49] IC50] IC51] R1] R243] R244] R245] R246]
component class U_fmc_digital_io_buffers30: C127^ C128^ C139^ C140^ C141^ D12^ IC49^ IC50^ IC51^ R1^ R243^ R244^ R245^ R246^
component class U_fmc_digital_io_buffers31: C127_ C128_ C139_ C140_ C141_ D12_ IC49_ IC50_ IC51_ R1_ R243_ R244_ R245_ R246_
component class U_fmc_digital_io_buffers32: C127` C128` C139` C140` C141` D12` IC49` IC50` IC51` R1` R243` R244` R245` R246`
component class U_fmc_digital_io_fmc_connector: FTG7 FTG8 FTG9 FTG10 FTG11 FTG12 J40
differential pair HEAC: +HEAC_P -HEAC_N
differential pair DATA2: +DATA2_P -DATA2_N
differential pair DATA1: +DATA1_P -DATA1_N
differential pair DATA0: +DATA0_P -DATA0_N
differential pair CON1R5: +CON1R5_P -CON1R5_N
differential pair CON1R4: +CON1R4_P -CON1R4_N
differential pair CON1R3: +CON1R3_P -CON1R3_N
differential pair CON1R2: +CON1R2_P -CON1R2_N
differential pair CON1R1: +CON1R1_P -CON1R1_N
differential pair CLK: +CLK_P -CLK_N
differential pair FMC19: +FMC1_P9 -FMC1_N9
differential pair FMC18: +FMC1_P8 -FMC1_N8
differential pair FMC17: +FMC1_P7 -FMC1_N7
differential pair FMC16: +FMC1_P6 -FMC1_N6
differential pair FMC15: +FMC1_P5 -FMC1_N5
differential pair FMC14: +FMC1_P4 -FMC1_N4
differential pair FMC13: +FMC1_P3 -FMC1_N3
differential pair FMC12: +FMC1_P2 -FMC1_N2
differential pair FMC11: +FMC1_P1 -FMC1_N1
differential pair CON19: +CON1_P9 -CON1_N9
differential pair CON18: +CON1_P8 -CON1_N8
differential pair CON17: +CON1_P7 -CON1_N7
differential pair CON16: +CON1_P6 -CON1_N6
differential pair CON15: +CON1_P5 -CON1_N5
differential pair CON14: +CON1_P4 -CON1_N4
differential pair CON13: +CON1_P3 -CON1_N3
differential pair CON12: +CON1_P2 -CON1_N2
differential pair CON11: +CON1_P1 -CON1_N1
differential pair FMC132: +FMC1_P32 -FMC1_N32
differential pair FMC131: +FMC1_P31 -FMC1_N31
differential pair FMC130: +FMC1_P30 -FMC1_N30
differential pair FMC129: +FMC1_P29 -FMC1_N29
differential pair FMC128: +FMC1_P28 -FMC1_N28
differential pair FMC127: +FMC1_P27 -FMC1_N27
differential pair FMC126: +FMC1_P26 -FMC1_N26
differential pair FMC125: +FMC1_P25 -FMC1_N25
differential pair FMC124: +FMC1_P24 -FMC1_N24
differential pair FMC123: +FMC1_P23 -FMC1_N23
differential pair FMC122: +FMC1_P22 -FMC1_N22
differential pair FMC121: +FMC1_P21 -FMC1_N21
differential pair FMC120: +FMC1_P20 -FMC1_N20
differential pair FMC119: +FMC1_P19 -FMC1_N19
differential pair FMC118: +FMC1_P18 -FMC1_N18
differential pair FMC117: +FMC1_P17 -FMC1_N17
differential pair FMC116: +FMC1_P16 -FMC1_N16
differential pair FMC115: +FMC1_P15 -FMC1_N15
differential pair FMC114: +FMC1_P14 -FMC1_N14
differential pair FMC113: +FMC1_P13 -FMC1_N13
differential pair FMC112: +FMC1_P12 -FMC1_N12
differential pair FMC111: +FMC1_P11 -FMC1_N11
differential pair FMC110: +FMC1_P10 -FMC1_N10
differential pair CON132: +CON1_P32 -CON1_N32
differential pair CON131: +CON1_P31 -CON1_N31
differential pair CON130: +CON1_P30 -CON1_N30
differential pair CON129: +CON1_P29 -CON1_N29
differential pair CON128: +CON1_P28 -CON1_N28
differential pair CON127: +CON1_P27 -CON1_N27
differential pair CON126: +CON1_P26 -CON1_N26
differential pair CON125: +CON1_P25 -CON1_N25
differential pair CON124: +CON1_P24 -CON1_N24
differential pair CON123: +CON1_P23 -CON1_N23
differential pair CON122: +CON1_P22 -CON1_N22
differential pair CON121: +CON1_P21 -CON1_N21
differential pair CON120: +CON1_P20 -CON1_N20
differential pair CON119: +CON1_P19 -CON1_N19
differential pair CON118: +CON1_P18 -CON1_N18
differential pair CON117: +CON1_P17 -CON1_N17
differential pair CON116: +CON1_P16 -CON1_N16
differential pair CON115: +CON1_P15 -CON1_N15
differential pair CON114: +CON1_P14 -CON1_N14
differential pair CON113: +CON1_P13 -CON1_N13
differential pair CON112: +CON1_P12 -CON1_N12
differential pair CON111: +CON1_P11 -CON1_N11
differential pair CON110: +CON1_P10 -CON1_N10

## Components (designator, comment, footprint, x,y, rotation, side; value= is the part's Value field where it differs from the comment)
B8 "Plated Hole" MTG300_600#1 6.436,16.511 r270 top
B9 "Plated Hole" MTG300_600#2 65.486,71.111 r270 top
B10 "Plated Hole" MTG300_600#1 69.436,16.511 r270 top
B11 "Plated Hole" MTG300_600#2 8.936,71.111 r270 top
C1 "100nF" CAPC1005X55N 61.798,20.777 r0 bottom
C2 "100nF" CAPC1005X55N 61.9,19.787 r0 bottom
C127[ "100nF" CAPC1005X55N 59.886,49.411 r0 top (schematic designator C127)
C127\ "100nF" CAPC1005X55N 61.636,32.161 r0 top (schematic designator C127)
C127] "100nF" CAPC1005X55N 63.636,49.411 r0 top (schematic designator C127)
C127^ "100nF" CAPC1005X55N 65.386,32.161 r0 top (schematic designator C127)
C127_ "100nF" CAPC1005X55N 67.386,49.411 r0 top (schematic designator C127)
C127` "100nF" CAPC1005X55N 69.136,32.161 r0 top (schematic designator C127)
C127A "100nF" CAPC1005X55N 11.136,49.411 r0 top (schematic designator C127)
C127B "100nF" CAPC1005X55N 12.886,32.161 r0 top (schematic designator C127)
C127C "100nF" CAPC1005X55N 14.886,49.411 r0 top (schematic designator C127)
C127D "100nF" CAPC1005X55N 16.636,32.161 r0 top (schematic designator C127)
C127E "100nF" CAPC1005X55N 18.636,49.411 r0 top (schematic designator C127)
C127F "100nF" CAPC1005X55N 20.386,32.161 r0 top (schematic designator C127)
C127G "100nF" CAPC1005X55N 22.386,49.411 r0 top (schematic designator C127)
C127H "100nF" CAPC1005X55N 24.136,32.161 r0 top (schematic designator C127)
C127I "100nF" CAPC1005X55N 26.136,49.411 r0 top (schematic designator C127)
C127J "100nF" CAPC1005X55N 27.886,32.161 r0 top (schematic designator C127)
C127K "100nF" CAPC1005X55N 29.886,49.411 r0 top (schematic designator C127)
C127L "100nF" CAPC1005X55N 31.636,32.161 r0 top (schematic designator C127)
C127M "100nF" CAPC1005X55N 33.636,49.411 r0 top (schematic designator C127)
C127N "100nF" CAPC1005X55N 35.386,32.161 r0 top (schematic designator C127)
C127O "100nF" CAPC1005X55N 37.386,49.411 r0 top (schematic designator C127)
C127P "100nF" CAPC1005X55N 39.136,32.161 r0 top (schematic designator C127)
C127Q "100nF" CAPC1005X55N 41.136,49.411 r0 top (schematic designator C127)
C127R "100nF" CAPC1005X55N 42.886,32.161 r0 top (schematic designator C127)
C127S "100nF" CAPC1005X55N 44.886,49.411 r0 top (schematic designator C127)
C127T "100nF" CAPC1005X55N 46.636,32.161 r0 top (schematic designator C127)
C127U "100nF" CAPC1005X55N 48.636,49.411 r0 top (schematic designator C127)
C127V "100nF" CAPC1005X55N 50.386,32.161 r0 top (schematic designator C127)
C127W "100nF" CAPC1005X55N 52.386,49.411 r0 top (schematic designator C127)
C127X "100nF" CAPC1005X55N 54.136,32.161 r0 top (schematic designator C127)
C127Y "100nF" CAPC1005X55N 56.136,49.411 r0 top (schematic designator C127)
C127Z "100nF" CAPC1005X55N 57.886,32.161 r0 top (schematic designator C127)
C128[ "100nF" CAPC1005X55N 58.677,53.502 r0 top (schematic designator C128)
C128\ "100nF" CAPC1005X55N 60.427,36.252 r0 top (schematic designator C128)
C128] "100nF" CAPC1005X55N 62.427,53.502 r0 top (schematic designator C128)
C128^ "100nF" CAPC1005X55N 64.177,36.252 r0 top (schematic designator C128)
C128_ "100nF" CAPC1005X55N 66.177,53.502 r0 top (schematic designator C128)
C128` "100nF" CAPC1005X55N 67.927,36.252 r0 top (schematic designator C128)
C128A "100nF" CAPC1005X55N 9.927,53.502 r0 top (schematic designator C128)
C128B "100nF" CAPC1005X55N 11.677,36.252 r0 top (schematic designator C128)
C128C "100nF" CAPC1005X55N 13.677,53.502 r0 top (schematic designator C128)
C128D "100nF" CAPC1005X55N 15.427,36.252 r0 top (schematic designator C128)
C128E "100nF" CAPC1005X55N 17.427,53.502 r0 top (schematic designator C128)
C128F "100nF" CAPC1005X55N 19.177,36.252 r0 top (schematic designator C128)
C128G "100nF" CAPC1005X55N 21.177,53.502 r0 top (schematic designator C128)
C128H "100nF" CAPC1005X55N 22.927,36.252 r0 top (schematic designator C128)
C128I "100nF" CAPC1005X55N 24.927,53.502 r0 top (schematic designator C128)
C128J "100nF" CAPC1005X55N 26.677,36.252 r0 top (schematic designator C128)
C128K "100nF" CAPC1005X55N 28.677,53.502 r0 top (schematic designator C128)
C128L "100nF" CAPC1005X55N 30.427,36.252 r0 top (schematic designator C128)
C128M "100nF" CAPC1005X55N 32.427,53.502 r0 top (schematic designator C128)
C128N "100nF" CAPC1005X55N 34.177,36.252 r0 top (schematic designator C128)
C128O "100nF" CAPC1005X55N 36.177,53.502 r0 top (schematic designator C128)
C128P "100nF" CAPC1005X55N 37.927,36.252 r0 top (schematic designator C128)
C128Q "100nF" CAPC1005X55N 39.927,53.502 r0 top (schematic designator C128)
C128R "100nF" CAPC1005X55N 41.677,36.252 r0 top (schematic designator C128)
C128S "100nF" CAPC1005X55N 43.677,53.502 r0 top (schematic designator C128)
C128T "100nF" CAPC1005X55N 45.427,36.252 r0 top (schematic designator C128)
C128U "100nF" CAPC1005X55N 47.427,53.502 r0 top (schematic designator C128)
C128V "100nF" CAPC1005X55N 49.177,36.252 r0 top (schematic designator C128)
C128W "100nF" CAPC1005X55N 51.177,53.502 r0 top (schematic designator C128)
C128X "100nF" CAPC1005X55N 52.927,36.252 r0 top (schematic designator C128)
C128Y "100nF" CAPC1005X55N 54.927,53.502 r0 top (schematic designator C128)
C128Z "100nF" CAPC1005X55N 56.677,36.252 r0 top (schematic designator C128)
C139[ "100nF" CAPC1005X55N 59.741,62.89 r180 bottom (schematic designator C139)
C139\ "100nF" CAPC1005X55N 57.836,45.669 r180 bottom (schematic designator C139)
C139] "100nF" CAPC1005X55N 63.5,62.89 r180 bottom (schematic designator C139)
C139^ "100nF" CAPC1005X55N 61.493,45.618 r180 bottom (schematic designator C139)
C139_ "100nF" CAPC1005X55N 67.285,62.865 r180 bottom (schematic designator C139)
C139` "100nF" CAPC1005X55N 65.253,45.593 r180 bottom (schematic designator C139)
C139A "100nF" CAPC1005X55N 10.897,62.865 r180 bottom (schematic designator C139)
C139B "100nF" CAPC1005X55N 69.037,45.618 r180 bottom (schematic designator C139)
C139C "100nF" CAPC1005X55N 13.741,61.112 r270 bottom (schematic designator C139)
C139D "100nF" CAPC1005X55N 12.7,45.669 r180 bottom (schematic designator C139)
C139E "100nF" CAPC1005X55N 19.355,62.89 r0 bottom (schematic designator C139)
C139F "100nF" CAPC1005X55N 16.485,45.644 r180 bottom (schematic designator C139)
C139G "100nF" CAPC1005X55N 22.225,62.865 r180 bottom (schematic designator C139)
C139H "100nF" CAPC1005X55N 20.244,45.644 r180 bottom (schematic designator C139)
C139I "100nF" CAPC1005X55N 25.984,62.865 r180 bottom (schematic designator C139)
C139J "100nF" CAPC1005X55N 23.901,45.669 r180 bottom (schematic designator C139)
C139K "100nF" CAPC1005X55N 29.794,62.89 r180 bottom (schematic designator C139)
C139L "100nF" CAPC1005X55N 27.737,45.644 r180 bottom (schematic designator C139)
C139M "100nF" CAPC1005X55N 33.503,62.865 r180 bottom (schematic designator C139)
C139N "100nF" CAPC1005X55N 31.496,45.618 r180 bottom (schematic designator C139)
C139O "100nF" CAPC1005X55N 37.262,62.865 r180 bottom (schematic designator C139)
C139P "100nF" CAPC1005X55N 35.204,45.644 r180 bottom (schematic designator C139)
C139Q "100nF" CAPC1005X55N 40.996,62.865 r180 bottom (schematic designator C139)
C139R "100nF" CAPC1005X55N 38.989,45.618 r180 bottom (schematic designator C139)
C139S "100nF" CAPC1005X55N 44.729,62.865 r180 bottom (schematic designator C139)
C139T "100nF" CAPC1005X55N 42.774,45.593 r180 bottom (schematic designator C139)
C139U "100nF" CAPC1005X55N 48.514,62.865 r180 bottom (schematic designator C139)
C139V "100nF" CAPC1005X55N 46.533,45.644 r180 bottom (schematic designator C139)
C139W "100nF" CAPC1005X55N 52.248,62.89 r180 bottom (schematic designator C139)
C139X "100nF" CAPC1005X55N 50.241,45.644 r180 bottom (schematic designator C139)
C139Y "100nF" CAPC1005X55N 56.007,62.89 r180 bottom (schematic designator C139)
C139Z "100nF" CAPC1005X55N 54,45.644 r180 bottom (schematic designator C139)
C140[ "100nF" CAPC1005X55N 60.912,64.779 r270 top (schematic designator C140)
C140\ "100nF" CAPC1005X55N 62.662,47.529 r270 top (schematic designator C140)
C140] "100nF" CAPC1005X55N 64.662,64.779 r270 top (schematic designator C140)
C140^ "100nF" CAPC1005X55N 66.412,47.529 r270 top (schematic designator C140)
C140_ "100nF" CAPC1005X55N 68.412,64.779 r270 top (schematic designator C140)
C140` "100nF" CAPC1005X55N 70.162,47.529 r270 top (schematic designator C140)
C140A "100nF" CAPC1005X55N 12.162,64.779 r270 top (schematic designator C140)
C140B "100nF" CAPC1005X55N 13.912,47.529 r270 top (schematic designator C140)
C140C "100nF" CAPC1005X55N 15.912,64.779 r270 top (schematic designator C140)
C140D "100nF" CAPC1005X55N 17.662,47.529 r270 top (schematic designator C140)
C140E "100nF" CAPC1005X55N 19.662,64.779 r270 top (schematic designator C140)
C140F "100nF" CAPC1005X55N 21.412,47.529 r270 top (schematic designator C140)
C140G "100nF" CAPC1005X55N 23.412,64.779 r270 top (schematic designator C140)
C140H "100nF" CAPC1005X55N 25.162,47.529 r270 top (schematic designator C140)
C140I "100nF" CAPC1005X55N 27.162,64.779 r270 top (schematic designator C140)
C140J "100nF" CAPC1005X55N 28.912,47.529 r270 top (schematic designator C140)
C140K "100nF" CAPC1005X55N 30.912,64.779 r270 top (schematic designator C140)
C140L "100nF" CAPC1005X55N 32.662,47.529 r270 top (schematic designator C140)
C140M "100nF" CAPC1005X55N 34.662,64.779 r270 top (schematic designator C140)
C140N "100nF" CAPC1005X55N 36.412,47.529 r270 top (schematic designator C140)
C140O "100nF" CAPC1005X55N 38.412,64.779 r270 top (schematic designator C140)
C140P "100nF" CAPC1005X55N 40.162,47.529 r270 top (schematic designator C140)
C140Q "100nF" CAPC1005X55N 42.162,64.779 r270 top (schematic designator C140)
C140R "100nF" CAPC1005X55N 43.912,47.529 r270 top (schematic designator C140)
C140S "100nF" CAPC1005X55N 45.912,64.779 r270 top (schematic designator C140)
C140T "100nF" CAPC1005X55N 47.662,47.529 r270 top (schematic designator C140)
C140U "100nF" CAPC1005X55N 49.662,64.779 r270 top (schematic designator C140)
C140V "100nF" CAPC1005X55N 51.412,47.529 r270 top (schematic designator C140)
C140W "100nF" CAPC1005X55N 53.412,64.779 r270 top (schematic designator C140)
C140X "100nF" CAPC1005X55N 55.162,47.529 r270 top (schematic designator C140)
C140Y "100nF" CAPC1005X55N 57.162,64.779 r270 top (schematic designator C140)
C140Z "100nF" CAPC1005X55N 58.912,47.529 r270 top (schematic designator C140)
C141[ "100nF" CAPC1005X55N 58.139,64.78 r270 top (schematic designator C141)
C141\ "100nF" CAPC1005X55N 59.889,47.53 r270 top (schematic designator C141)
C141] "100nF" CAPC1005X55N 61.889,64.78 r270 top (schematic designator C141)
C141^ "100nF" CAPC1005X55N 63.639,47.53 r270 top (schematic designator C141)
C141_ "100nF" CAPC1005X55N 65.639,64.78 r270 top (schematic designator C141)
C141` "100nF" CAPC1005X55N 67.389,47.53 r270 top (schematic designator C141)
C141A "100nF" CAPC1005X55N 9.389,64.78 r270 top (schematic designator C141)
C141B "100nF" CAPC1005X55N 11.139,47.53 r270 top (schematic designator C141)
C141C "100nF" CAPC1005X55N 13.139,64.78 r270 top (schematic designator C141)
C141D "100nF" CAPC1005X55N 14.889,47.53 r270 top (schematic designator C141)
C141E "100nF" CAPC1005X55N 16.889,64.78 r270 top (schematic designator C141)
C141F "100nF" CAPC1005X55N 18.639,47.53 r270 top (schematic designator C141)
C141G "100nF" CAPC1005X55N 20.639,64.78 r270 top (schematic designator C141)
C141H "100nF" CAPC1005X55N 22.389,47.53 r270 top (schematic designator C141)
C141I "100nF" CAPC1005X55N 24.389,64.78 r270 top (schematic designator C141)
C141J "100nF" CAPC1005X55N 26.139,47.53 r270 top (schematic designator C141)
C141K "100nF" CAPC1005X55N 28.139,64.78 r270 top (schematic designator C141)
C141L "100nF" CAPC1005X55N 29.889,47.53 r270 top (schematic designator C141)
C141M "100nF" CAPC1005X55N 31.889,64.78 r270 top (schematic designator C141)
C141N "100nF" CAPC1005X55N 33.639,47.53 r270 top (schematic designator C141)
C141O "100nF" CAPC1005X55N 35.639,64.78 r270 top (schematic designator C141)
C141P "100nF" CAPC1005X55N 37.389,47.53 r270 top (schematic designator C141)
C141Q "100nF" CAPC1005X55N 39.389,64.78 r270 top (schematic designator C141)
C141R "100nF" CAPC1005X55N 41.139,47.53 r270 top (schematic designator C141)
C141S "100nF" CAPC1005X55N 43.139,64.78 r270 top (schematic designator C141)
C141T "100nF" CAPC1005X55N 44.889,47.53 r270 top (schematic designator C141)
C141U "100nF" CAPC1005X55N 46.889,64.78 r270 top (schematic designator C141)
C141V "100nF" CAPC1005X55N 48.639,47.53 r270 top (schematic designator C141)
C141W "100nF" CAPC1005X55N 50.639,64.78 r270 top (schematic designator C141)
C141X "100nF" CAPC1005X55N 52.389,47.53 r270 top (schematic designator C141)
C141Y "100nF" CAPC1005X55N 54.389,64.78 r270 top (schematic designator C141)
C141Z "100nF" CAPC1005X55N 56.139,47.53 r270 top (schematic designator C141)
C146 "100nF" CAPC1005X55N 9.169,35.306 r270 top
C147 "22uF" CAPC3216X180N 6.426,44.552 r270 top
C148 "22uF" CAPC3216X180N 5.893,31.496 r90 top
C149 "100nF" CAPC1005X55N 9.22,37.694 r90 top
C150 "15pF" CAPC1005X55N 5.436,39.345 r0 top
C151 "100nF" CAPC1005X55N 5.69,41.656 r0 top
C152 "100nF" CAPC1005X55N 8.814,41.199 r90 top
C153 "100nF" CAPC1005X55N 65.151,29.794 r180 top
C154 "100nF" CAPC1005X55N 50.673,30.074 r180 top
C155 "100nF" CAPC1005X55N 35.23,30.226 r180 top
C156 "100nF" CAPC1005X55N 20.574,30.251 r180 top
C157 "100nF" CAPC1005X55N 24.663,69.825 r90 top
C158 "100nF" CAPC1005X55N 16.441,69.91 r0 top
C159 "100nF" CAPC1005X55N 69.672,51.359 r90 top
C160 "100nF" CAPC1005X55N 19.482,13.97 r0 bottom
C161 "100nF" CAPC1005X55N 23.419,13.843 r270 bottom
C162 "100nF" CAPC1005X55N 46.482,13.868 r0 bottom
C163 "100nF" CAPC1005X55N 68.174,20.803 r90 top
C164 "100nF" CAPC1005X55N 68.605,29.134 r270 top
C165 "100nF" CAPC1005X55N 40.31,30.328 r0 bottom
C166 "100nF" CAPC1005X55N 67.818,10.414 r90 top
D12[ "PRTR5V0U2X" SOT190P230X110-4N 59.439,61.96 r270 top (schematic designator D12)
D12\ "PRTR5V0U2X" SOT190P230X110-4N 61.189,44.71 r270 top (schematic designator D12)
D12] "PRTR5V0U2X" SOT190P230X110-4N 63.189,61.96 r270 top (schematic designator D12)
D12^ "PRTR5V0U2X" SOT190P230X110-4N 64.939,44.71 r270 top (schematic designator D12)
D12_ "PRTR5V0U2X" SOT190P230X110-4N 66.939,61.96 r270 top (schematic designator D12)
D12` "PRTR5V0U2X" SOT190P230X110-4N 68.689,44.71 r270 top (schematic designator D12)
D12A "PRTR5V0U2X" SOT190P230X110-4N 10.689,61.96 r270 top (schematic designator D12)
D12B "PRTR5V0U2X" SOT190P230X110-4N 12.439,44.71 r270 top (schematic designator D12)
D12C "PRTR5V0U2X" SOT190P230X110-4N 14.439,61.96 r270 top (schematic designator D12)
D12D "PRTR5V0U2X" SOT190P230X110-4N 16.189,44.71 r270 top (schematic designator D12)
D12E "PRTR5V0U2X" SOT190P230X110-4N 18.189,61.96 r270 top (schematic designator D12)
D12F "PRTR5V0U2X" SOT190P230X110-4N 19.939,44.71 r270 top (schematic designator D12)
D12G "PRTR5V0U2X" SOT190P230X110-4N 21.939,61.96 r270 top (schematic designator D12)
D12H "PRTR5V0U2X" SOT190P230X110-4N 23.689,44.71 r270 top (schematic designator D12)
D12I "PRTR5V0U2X" SOT190P230X110-4N 25.689,61.96 r270 top (schematic designator D12)
D12J "PRTR5V0U2X" SOT190P230X110-4N 27.439,44.71 r270 top (schematic designator D12)
D12K "PRTR5V0U2X" SOT190P230X110-4N 29.439,61.96 r270 top (schematic designator D12)
D12L "PRTR5V0U2X" SOT190P230X110-4N 31.189,44.71 r270 top (schematic designator D12)
D12M "PRTR5V0U2X" SOT190P230X110-4N 33.189,61.96 r270 top (schematic designator D12)
D12N "PRTR5V0U2X" SOT190P230X110-4N 34.939,44.71 r270 top (schematic designator D12)
D12O "PRTR5V0U2X" SOT190P230X110-4N 36.939,61.96 r270 top (schematic designator D12)
D12P "PRTR5V0U2X" SOT190P230X110-4N 38.689,44.71 r270 top (schematic designator D12)
D12Q "PRTR5V0U2X" SOT190P230X110-4N 40.689,61.96 r270 top (schematic designator D12)
D12R "PRTR5V0U2X" SOT190P230X110-4N 42.439,44.71 r270 top (schematic designator D12)
D12S "PRTR5V0U2X" SOT190P230X110-4N 44.439,61.96 r270 top (schematic designator D12)
D12T "PRTR5V0U2X" SOT190P230X110-4N 46.189,44.71 r270 top (schematic designator D12)
D12U "PRTR5V0U2X" SOT190P230X110-4N 48.189,61.96 r270 top (schematic designator D12)
D12V "PRTR5V0U2X" SOT190P230X110-4N 49.939,44.71 r270 top (schematic designator D12)
D12W "PRTR5V0U2X" SOT190P230X110-4N 51.939,61.96 r270 top (schematic designator D12)
D12X "PRTR5V0U2X" SOT190P230X110-4N 53.689,44.71 r270 top (schematic designator D12)
D12Y "PRTR5V0U2X" SOT190P230X110-4N 55.689,61.96 r270 top (schematic designator D12)
D12Z "PRTR5V0U2X" SOT190P230X110-4N 57.439,44.71 r270 top (schematic designator D12)
F6 "140mA-60V" FUSRC4632X90N 20.447,73.863 r90 bottom
F7 "140mA-60V" FUSRC4632X90N 60.815,69.91 r270 bottom
FTG7 "Use only in PCB" FIDUCIAL_TOP_S100-200 5.766,52.349 r270 top
FTG8 "Use only in PCB" FIDUCIAL_TOP_S100-200 70.561,57.709 r270 top
FTG9 "Use only in PCB" FIDUCIAL_TOP_S100-200 6.375,8.941 r270 top
FTG10 "Use only in PCB" FIDUCIAL_TOP_S100-200 5.74,52.324 r90 bottom
FTG11 "Use only in PCB" FIDUCIAL_TOP_S100-200 6.375,8.941 r90 bottom
FTG12 "Use only in PCB" FIDUCIAL_TOP_S100-200 69.527,8.138 r90 bottom
IC1 "TXB0304RUTR" "TEXAS_RUT (R-PUQFN-N12)" 59.639,19.05 r90 bottom
IC49[ "FIN1101K8X" US8 59.986,56.211 r90 top (schematic designator IC49)
IC49\ "FIN1101K8X" US8 61.736,38.961 r90 top (schematic designator IC49)
IC49] "FIN1101K8X" US8 63.736,56.211 r90 top (schematic designator IC49)
IC49^ "FIN1101K8X" US8 65.486,38.961 r90 top (schematic designator IC49)
IC49_ "FIN1101K8X" US8 67.486,56.211 r90 top (schematic designator IC49)
IC49` "FIN1101K8X" US8 69.236,38.961 r90 top (schematic designator IC49)
IC49A "FIN1101K8X" US8 11.236,56.211 r90 top (schematic designator IC49)
IC49B "FIN1101K8X" US8 12.986,38.961 r90 top (schematic designator IC49)
IC49C "FIN1101K8X" US8 14.986,56.211 r90 top (schematic designator IC49)
IC49D "FIN1101K8X" US8 16.736,38.961 r90 top (schematic designator IC49)
IC49E "FIN1101K8X" US8 18.736,56.211 r90 top (schematic designator IC49)
IC49F "FIN1101K8X" US8 20.486,38.961 r90 top (schematic designator IC49)
IC49G "FIN1101K8X" US8 22.486,56.211 r90 top (schematic designator IC49)
IC49H "FIN1101K8X" US8 24.236,38.961 r90 top (schematic designator IC49)
IC49I "FIN1101K8X" US8 26.236,56.211 r90 top (schematic designator IC49)
IC49J "FIN1101K8X" US8 27.986,38.961 r90 top (schematic designator IC49)
IC49K "FIN1101K8X" US8 29.986,56.211 r90 top (schematic designator IC49)
IC49L "FIN1101K8X" US8 31.736,38.961 r90 top (schematic designator IC49)
IC49M "FIN1101K8X" US8 33.736,56.211 r90 top (schematic designator IC49)
IC49N "FIN1101K8X" US8 35.486,38.961 r90 top (schematic designator IC49)
IC49O "FIN1101K8X" US8 37.486,56.211 r90 top (schematic designator IC49)
IC49P "FIN1101K8X" US8 39.236,38.961 r90 top (schematic designator IC49)
IC49Q "FIN1101K8X" US8 41.236,56.211 r90 top (schematic designator IC49)
IC49R "FIN1101K8X" US8 42.986,38.961 r90 top (schematic designator IC49)
IC49S "FIN1101K8X" US8 44.986,56.211 r90 top (schematic designator IC49)
IC49T "FIN1101K8X" US8 46.736,38.961 r90 top (schematic designator IC49)
IC49U "FIN1101K8X" US8 48.736,56.211 r90 top (schematic designator IC49)
IC49V "FIN1101K8X" US8 50.486,38.961 r90 top (schematic designator IC49)
IC49W "FIN1101K8X" US8 52.486,56.211 r90 top (schematic designator IC49)
IC49X "FIN1101K8X" US8 54.236,38.961 r90 top (schematic designator IC49)
IC49Y "FIN1101K8X" US8 56.236,56.211 r90 top (schematic designator IC49)
IC49Z "FIN1101K8X" US8 57.986,38.961 r90 top (schematic designator IC49)
IC50[ "FIN1101K8X" US8 59.478,56.211 r90 bottom (schematic designator IC50)
IC50\ "FIN1101K8X" US8 61.228,38.961 r90 bottom (schematic designator IC50)
IC50] "FIN1101K8X" US8 63.228,56.211 r90 bottom (schematic designator IC50)
IC50^ "FIN1101K8X" US8 64.978,38.961 r90 bottom (schematic designator IC50)
IC50_ "FIN1101K8X" US8 66.978,56.211 r90 bottom (schematic designator IC50)
IC50` "FIN1101K8X" US8 68.728,38.961 r90 bottom (schematic designator IC50)
IC50A "FIN1101K8X" US8 10.728,56.211 r90 bottom (schematic designator IC50)
IC50B "FIN1101K8X" US8 12.478,38.961 r90 bottom (schematic designator IC50)
IC50C "FIN1101K8X" US8 14.478,56.211 r90 bottom (schematic designator IC50)
IC50D "FIN1101K8X" US8 16.228,38.961 r90 bottom (schematic designator IC50)
IC50E "FIN1101K8X" US8 18.228,56.211 r90 bottom (schematic designator IC50)
IC50F "FIN1101K8X" US8 19.978,38.961 r90 bottom (schematic designator IC50)
IC50G "FIN1101K8X" US8 21.978,56.211 r90 bottom (schematic designator IC50)
IC50H "FIN1101K8X" US8 23.728,38.961 r90 bottom (schematic designator IC50)
IC50I "FIN1101K8X" US8 25.728,56.211 r90 bottom (schematic designator IC50)
IC50J "FIN1101K8X" US8 27.478,38.961 r90 bottom (schematic designator IC50)
IC50K "FIN1101K8X" US8 29.478,56.211 r90 bottom (schematic designator IC50)
IC50L "FIN1101K8X" US8 31.228,38.961 r90 bottom (schematic designator IC50)
IC50M "FIN1101K8X" US8 33.228,56.211 r90 bottom (schematic designator IC50)
IC50N "FIN1101K8X" US8 34.978,38.961 r90 bottom (schematic designator IC50)
IC50O "FIN1101K8X" US8 36.978,56.211 r90 bottom (schematic designator IC50)
IC50P "FIN1101K8X" US8 38.728,38.961 r90 bottom (schematic designator IC50)
IC50Q "FIN1101K8X" US8 40.728,56.211 r90 bottom (schematic designator IC50)
IC50R "FIN1101K8X" US8 42.478,38.961 r90 bottom (schematic designator IC50)
IC50S "FIN1101K8X" US8 44.478,56.211 r90 bottom (schematic designator IC50)
IC50T "FIN1101K8X" US8 46.228,38.961 r90 bottom (schematic designator IC50)
IC50U "FIN1101K8X" US8 48.228,56.211 r90 bottom (schematic designator IC50)
IC50V "FIN1101K8X" US8 49.978,38.961 r90 bottom (schematic designator IC50)
IC50W "FIN1101K8X" US8 51.978,56.211 r90 bottom (schematic designator IC50)
IC50X "FIN1101K8X" US8 53.728,38.961 r90 bottom (schematic designator IC50)
IC50Y "FIN1101K8X" US8 55.728,56.211 r90 bottom (schematic designator IC50)
IC50Z "FIN1101K8X" US8 57.478,38.961 r90 bottom (schematic designator IC50)
IC51[ "74AHC1G04GW" SOT65P212X110-5N 59.386,51.411 r0 top (schematic designator IC51)
IC51\ "74AHC1G04GW" SOT65P212X110-5N 61.136,34.161 r0 top (schematic designator IC51)
IC51] "74AHC1G04GW" SOT65P212X110-5N 63.136,51.411 r0 top (schematic designator IC51)
IC51^ "74AHC1G04GW" SOT65P212X110-5N 64.886,34.161 r0 top (schematic designator IC51)
IC51_ "74AHC1G04GW" SOT65P212X110-5N 66.886,51.411 r0 top (schematic designator IC51)
IC51` "74AHC1G04GW" SOT65P212X110-5N 68.636,34.161 r0 top (schematic designator IC51)
IC51A "74AHC1G04GW" SOT65P212X110-5N 10.636,51.411 r0 top (schematic designator IC51)
IC51B "74AHC1G04GW" SOT65P212X110-5N 12.386,34.161 r0 top (schematic designator IC51)
IC51C "74AHC1G04GW" SOT65P212X110-5N 14.386,51.411 r0 top (schematic designator IC51)
IC51D "74AHC1G04GW" SOT65P212X110-5N 16.136,34.161 r0 top (schematic designator IC51)
IC51E "74AHC1G04GW" SOT65P212X110-5N 18.136,51.411 r0 top (schematic designator IC51)
IC51F "74AHC1G04GW" SOT65P212X110-5N 19.886,34.161 r0 top (schematic designator IC51)
IC51G "74AHC1G04GW" SOT65P212X110-5N 21.886,51.411 r0 top (schematic designator IC51)
IC51H "74AHC1G04GW" SOT65P212X110-5N 23.636,34.161 r0 top (schematic designator IC51)
IC51I "74AHC1G04GW" SOT65P212X110-5N 25.636,51.411 r0 top (schematic designator IC51)
IC51J "74AHC1G04GW" SOT65P212X110-5N 27.386,34.161 r0 top (schematic designator IC51)
IC51K "74AHC1G04GW" SOT65P212X110-5N 29.386,51.411 r0 top (schematic designator IC51)
IC51L "74AHC1G04GW" SOT65P212X110-5N 31.136,34.161 r0 top (schematic designator IC51)
IC51M "74AHC1G04GW" SOT65P212X110-5N 33.136,51.411 r0 top (schematic designator IC51)
IC51N "74AHC1G04GW" SOT65P212X110-5N 34.886,34.161 r0 top (schematic designator IC51)
IC51O "74AHC1G04GW" SOT65P212X110-5N 36.886,51.411 r0 top (schematic designator IC51)
IC51P "74AHC1G04GW" SOT65P212X110-5N 38.636,34.161 r0 top (schematic designator IC51)
IC51Q "74AHC1G04GW" SOT65P212X110-5N 40.636,51.411 r0 top (schematic designator IC51)
IC51R "74AHC1G04GW" SOT65P212X110-5N 42.386,34.161 r0 top (schematic designator IC51)
IC51S "74AHC1G04GW" SOT65P212X110-5N 44.386,51.411 r0 top (schematic designator IC51)
IC51T "74AHC1G04GW" SOT65P212X110-5N 46.136,34.161 r0 top (schematic designator IC51)
IC51U "74AHC1G04GW" SOT65P212X110-5N 48.136,51.411 r0 top (schematic designator IC51)
IC51V "74AHC1G04GW" SOT65P212X110-5N 49.886,34.161 r0 top (schematic designator IC51)
IC51W "74AHC1G04GW" SOT65P212X110-5N 51.886,51.411 r0 top (schematic designator IC51)
IC51X "74AHC1G04GW" SOT65P212X110-5N 53.636,34.161 r0 top (schematic designator IC51)
IC51Y "74AHC1G04GW" SOT65P212X110-5N 55.636,51.411 r0 top (schematic designator IC51)
IC51Z "74AHC1G04GW" SOT65P212X110-5N 57.386,34.161 r0 top (schematic designator IC51)
IC55 "TPS51200DRCT" "TEXAS_DRC (S-PVSON-N10)" 6.604,36.5 r270 top
IC56 "SN74LV595APWT" SOP65P640X120-16N 15.646,27.762 r0 top
IC57 "SN74LV595APWT" SOP65P640X120-16N 30.378,27.762 r0 top
IC58 "SN74LV595APWT" SOP65P640X120-16N 45.517,27.534 r0 top
IC59 "SN74LV595APWT" SOP65P640X120-16N 60.147,27.305 r0 top
IC60 "TCA4311ADGKR" msop-8 69.926,25.019 r90 top
IC61 "24AA64T-I/MC" SON50P300X200X100-9N-S175X155 69.621,10.338 r90 top
IC62 "MCP9801-M/MS" SOP65P490X110-8N 39.929,26.543 r90 bottom
J40 "VITA 57" SAMTEC_ASP-127797-01 37.927,14.511 r180 top locked
J41 "HDMI" MOLEX_46765-1001 15.316,77.292 r180 top
J42 "DNP" MOLEX_71430-0013 41.123,75.717 r0 top locked
R1[ "0" RESC1005X40N 60.706,60.909 r90 bottom (schematic designator R1)
R1\ "0" RESC1005X40N 62.509,43.764 r90 bottom (schematic designator R1)
R1] "0" RESC1005X40N 64.491,60.985 r90 bottom (schematic designator R1)
R1^ "0" RESC1005X40N 66.192,43.79 r90 bottom (schematic designator R1)
R1_ "0" RESC1005X40N 68.123,60.935 r90 bottom (schematic designator R1)
R1` "0" RESC1005X40N 69.952,43.688 r90 bottom (schematic designator R1)
R1A "0" RESC1005X40N 11.938,60.935 r90 bottom (schematic designator R1)
R1B "0" RESC1005X40N 13.716,43.739 r90 bottom (schematic designator R1)
R1C "0" RESC1005X40N 15.519,60.884 r90 bottom (schematic designator R1)
R1D "0" RESC1005X40N 17.45,43.713 r90 bottom (schematic designator R1)
R1E "0" RESC1005X40N 19.837,61.29 r90 bottom (schematic designator R1)